# Altium PCB Tigershark 3D R1.2.PcbDoc (part 1 of 3)
Units mil, origin at the board's own origin, x right, y up, seen from the top; angles counter-clockwise.
Board outline 6000 x 4500 mil, 4 copper layers (Top Layer, Groun Plane, Power Plane, Bottom Layer); 257 components, 247 nets, 1014 pads, 620 vias.
Unrouted connection lines stored in the file: 332.
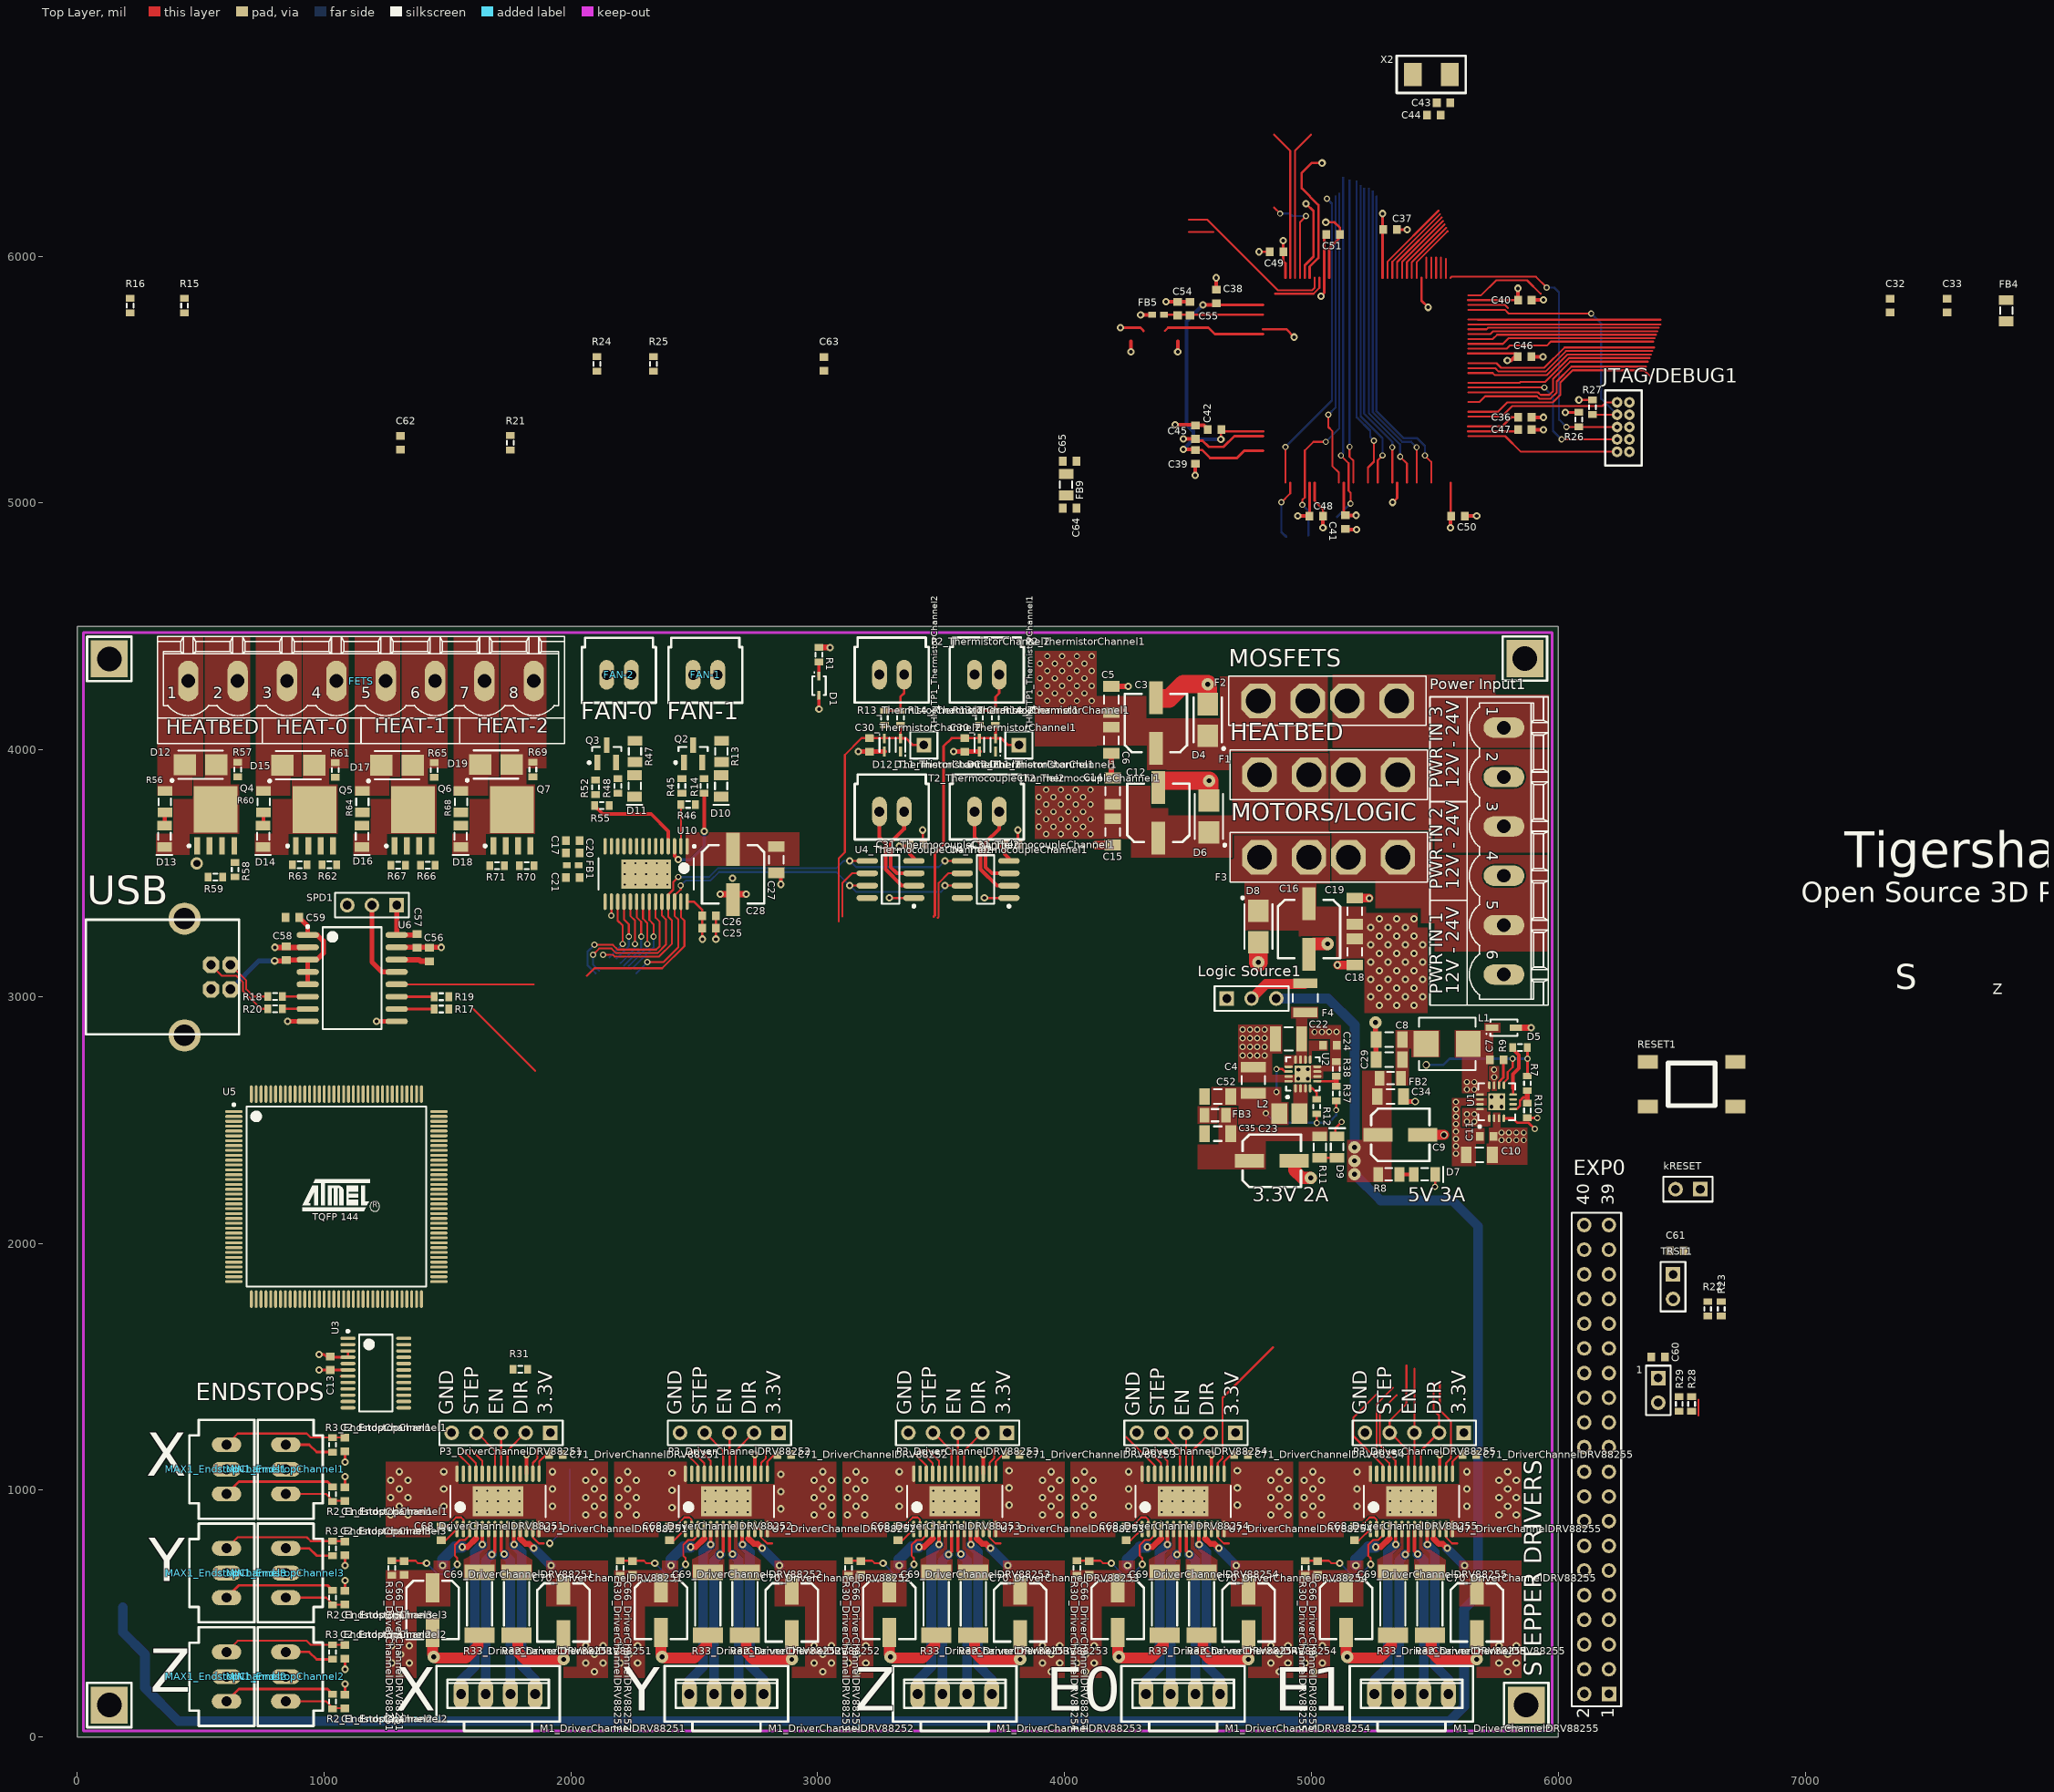
[diagram p0: Top Layer view]
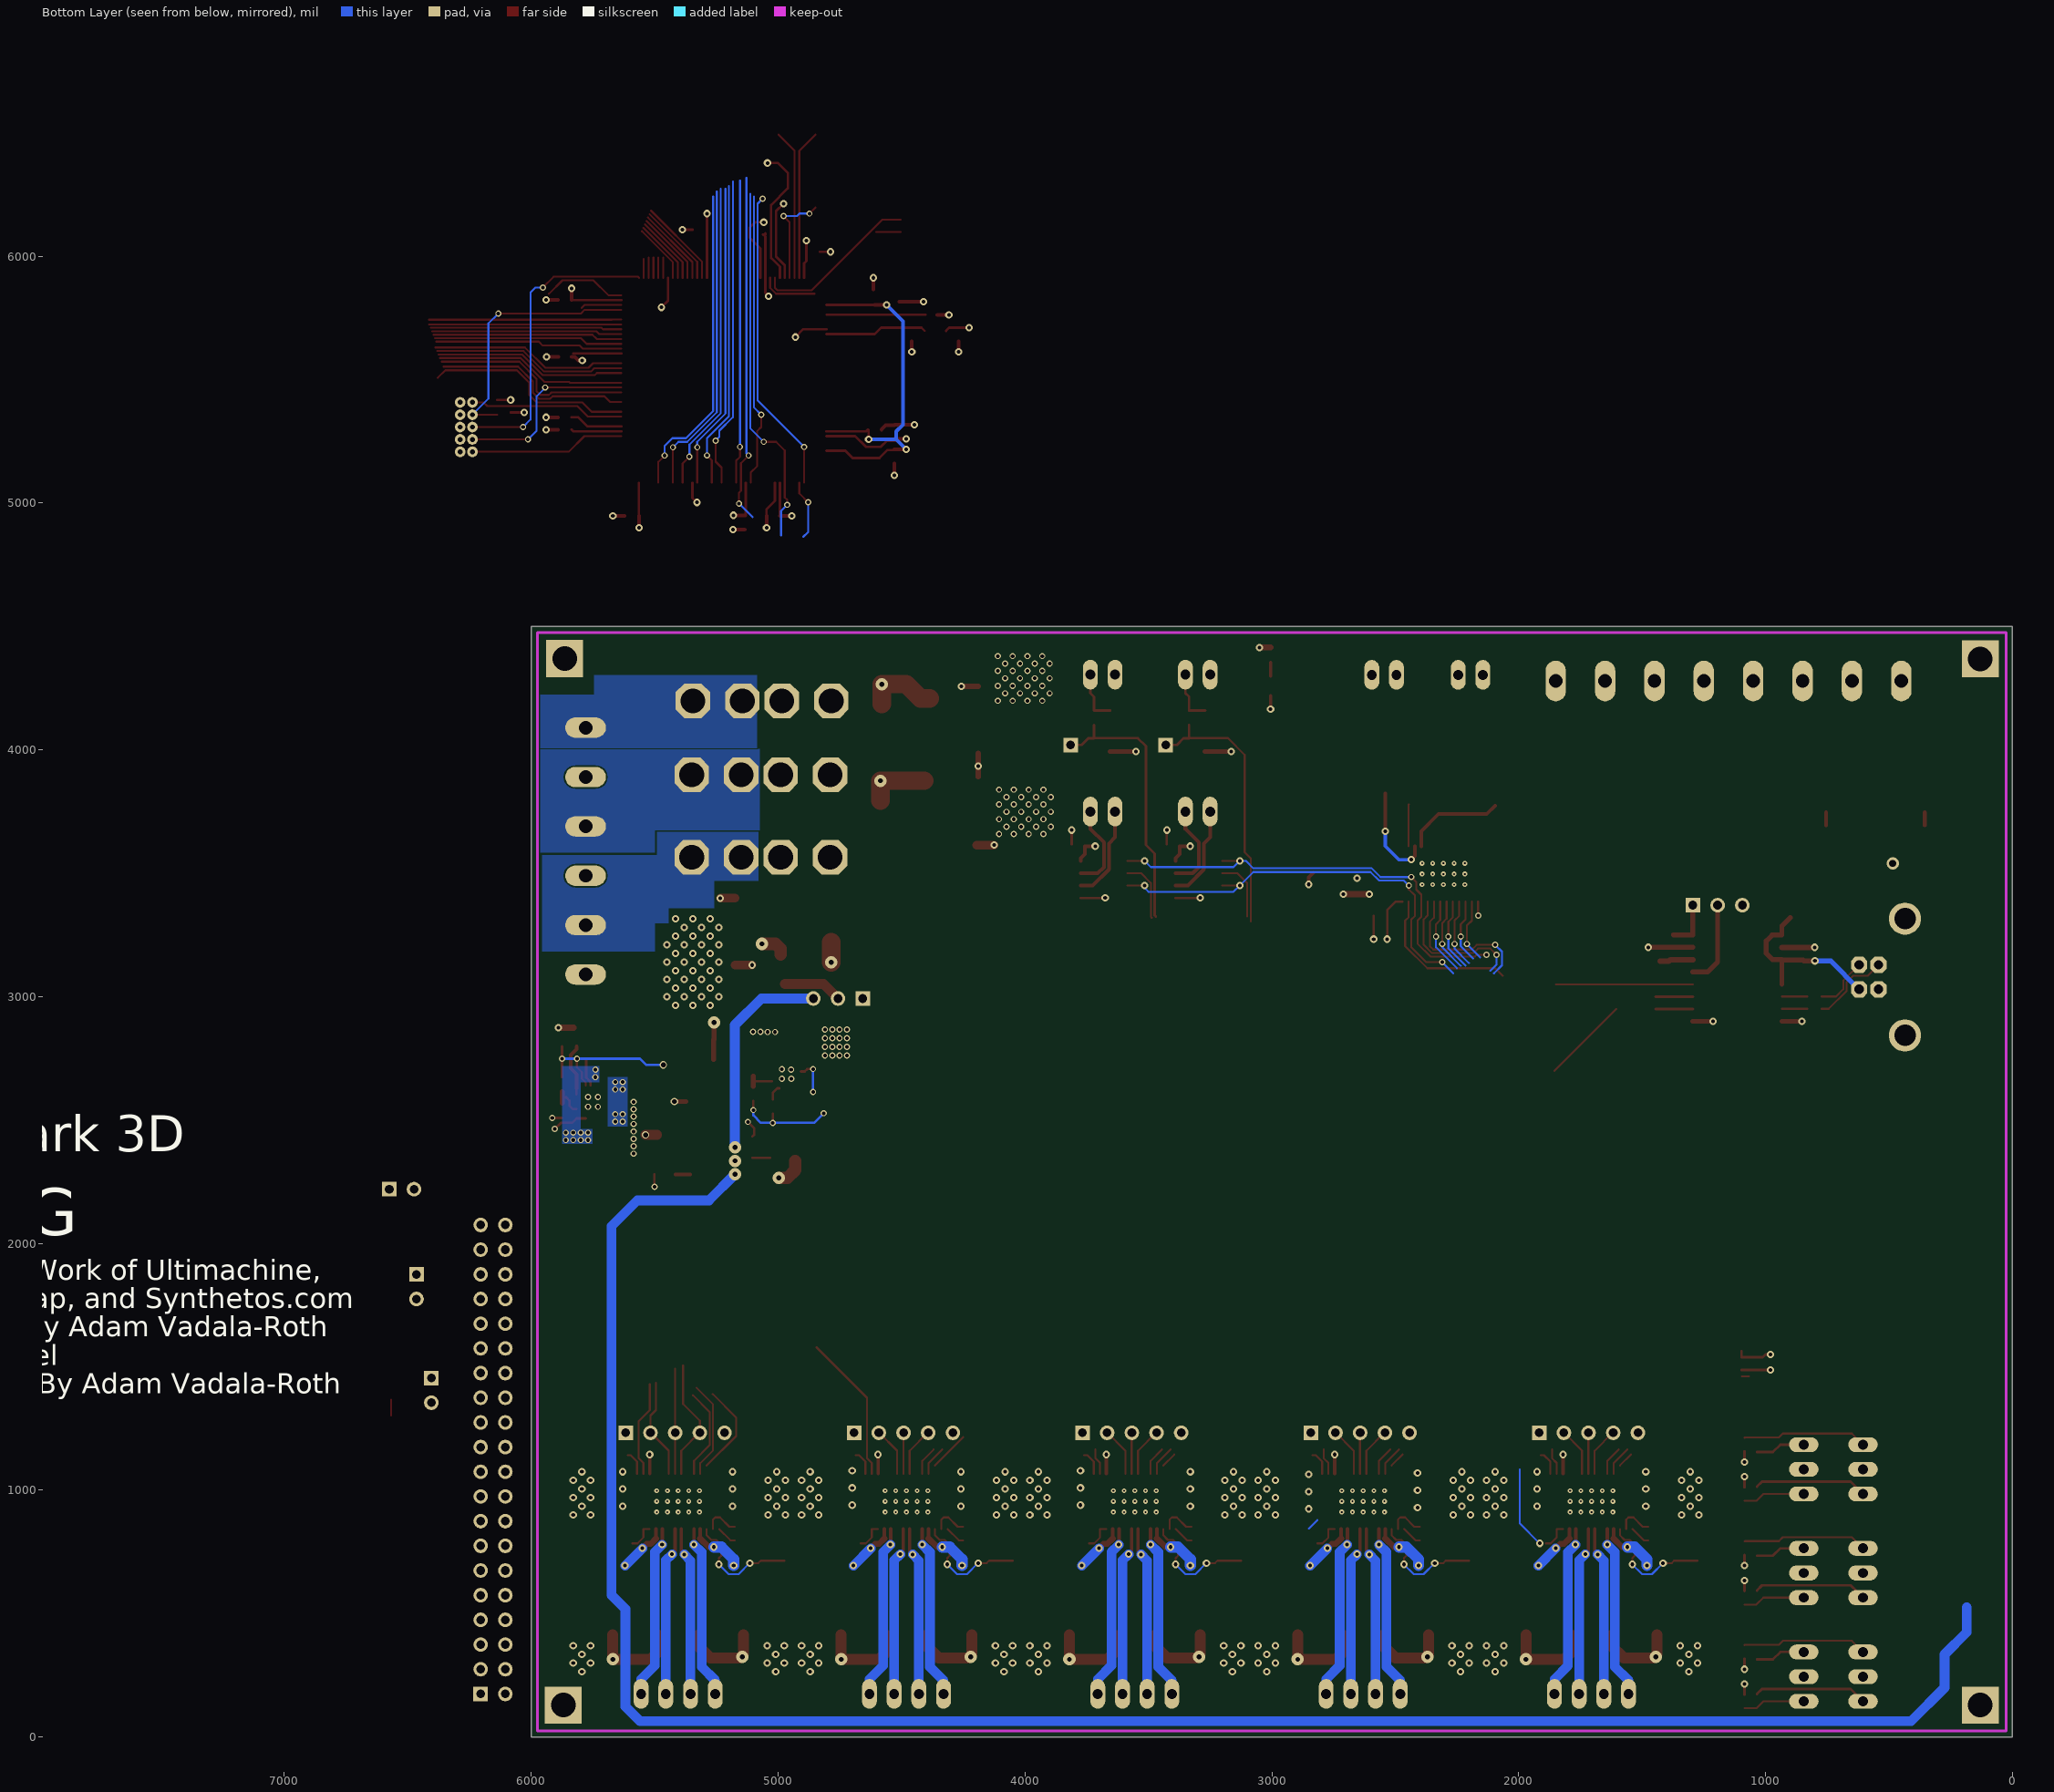
[diagram p1: Bottom Layer view, seen from below]
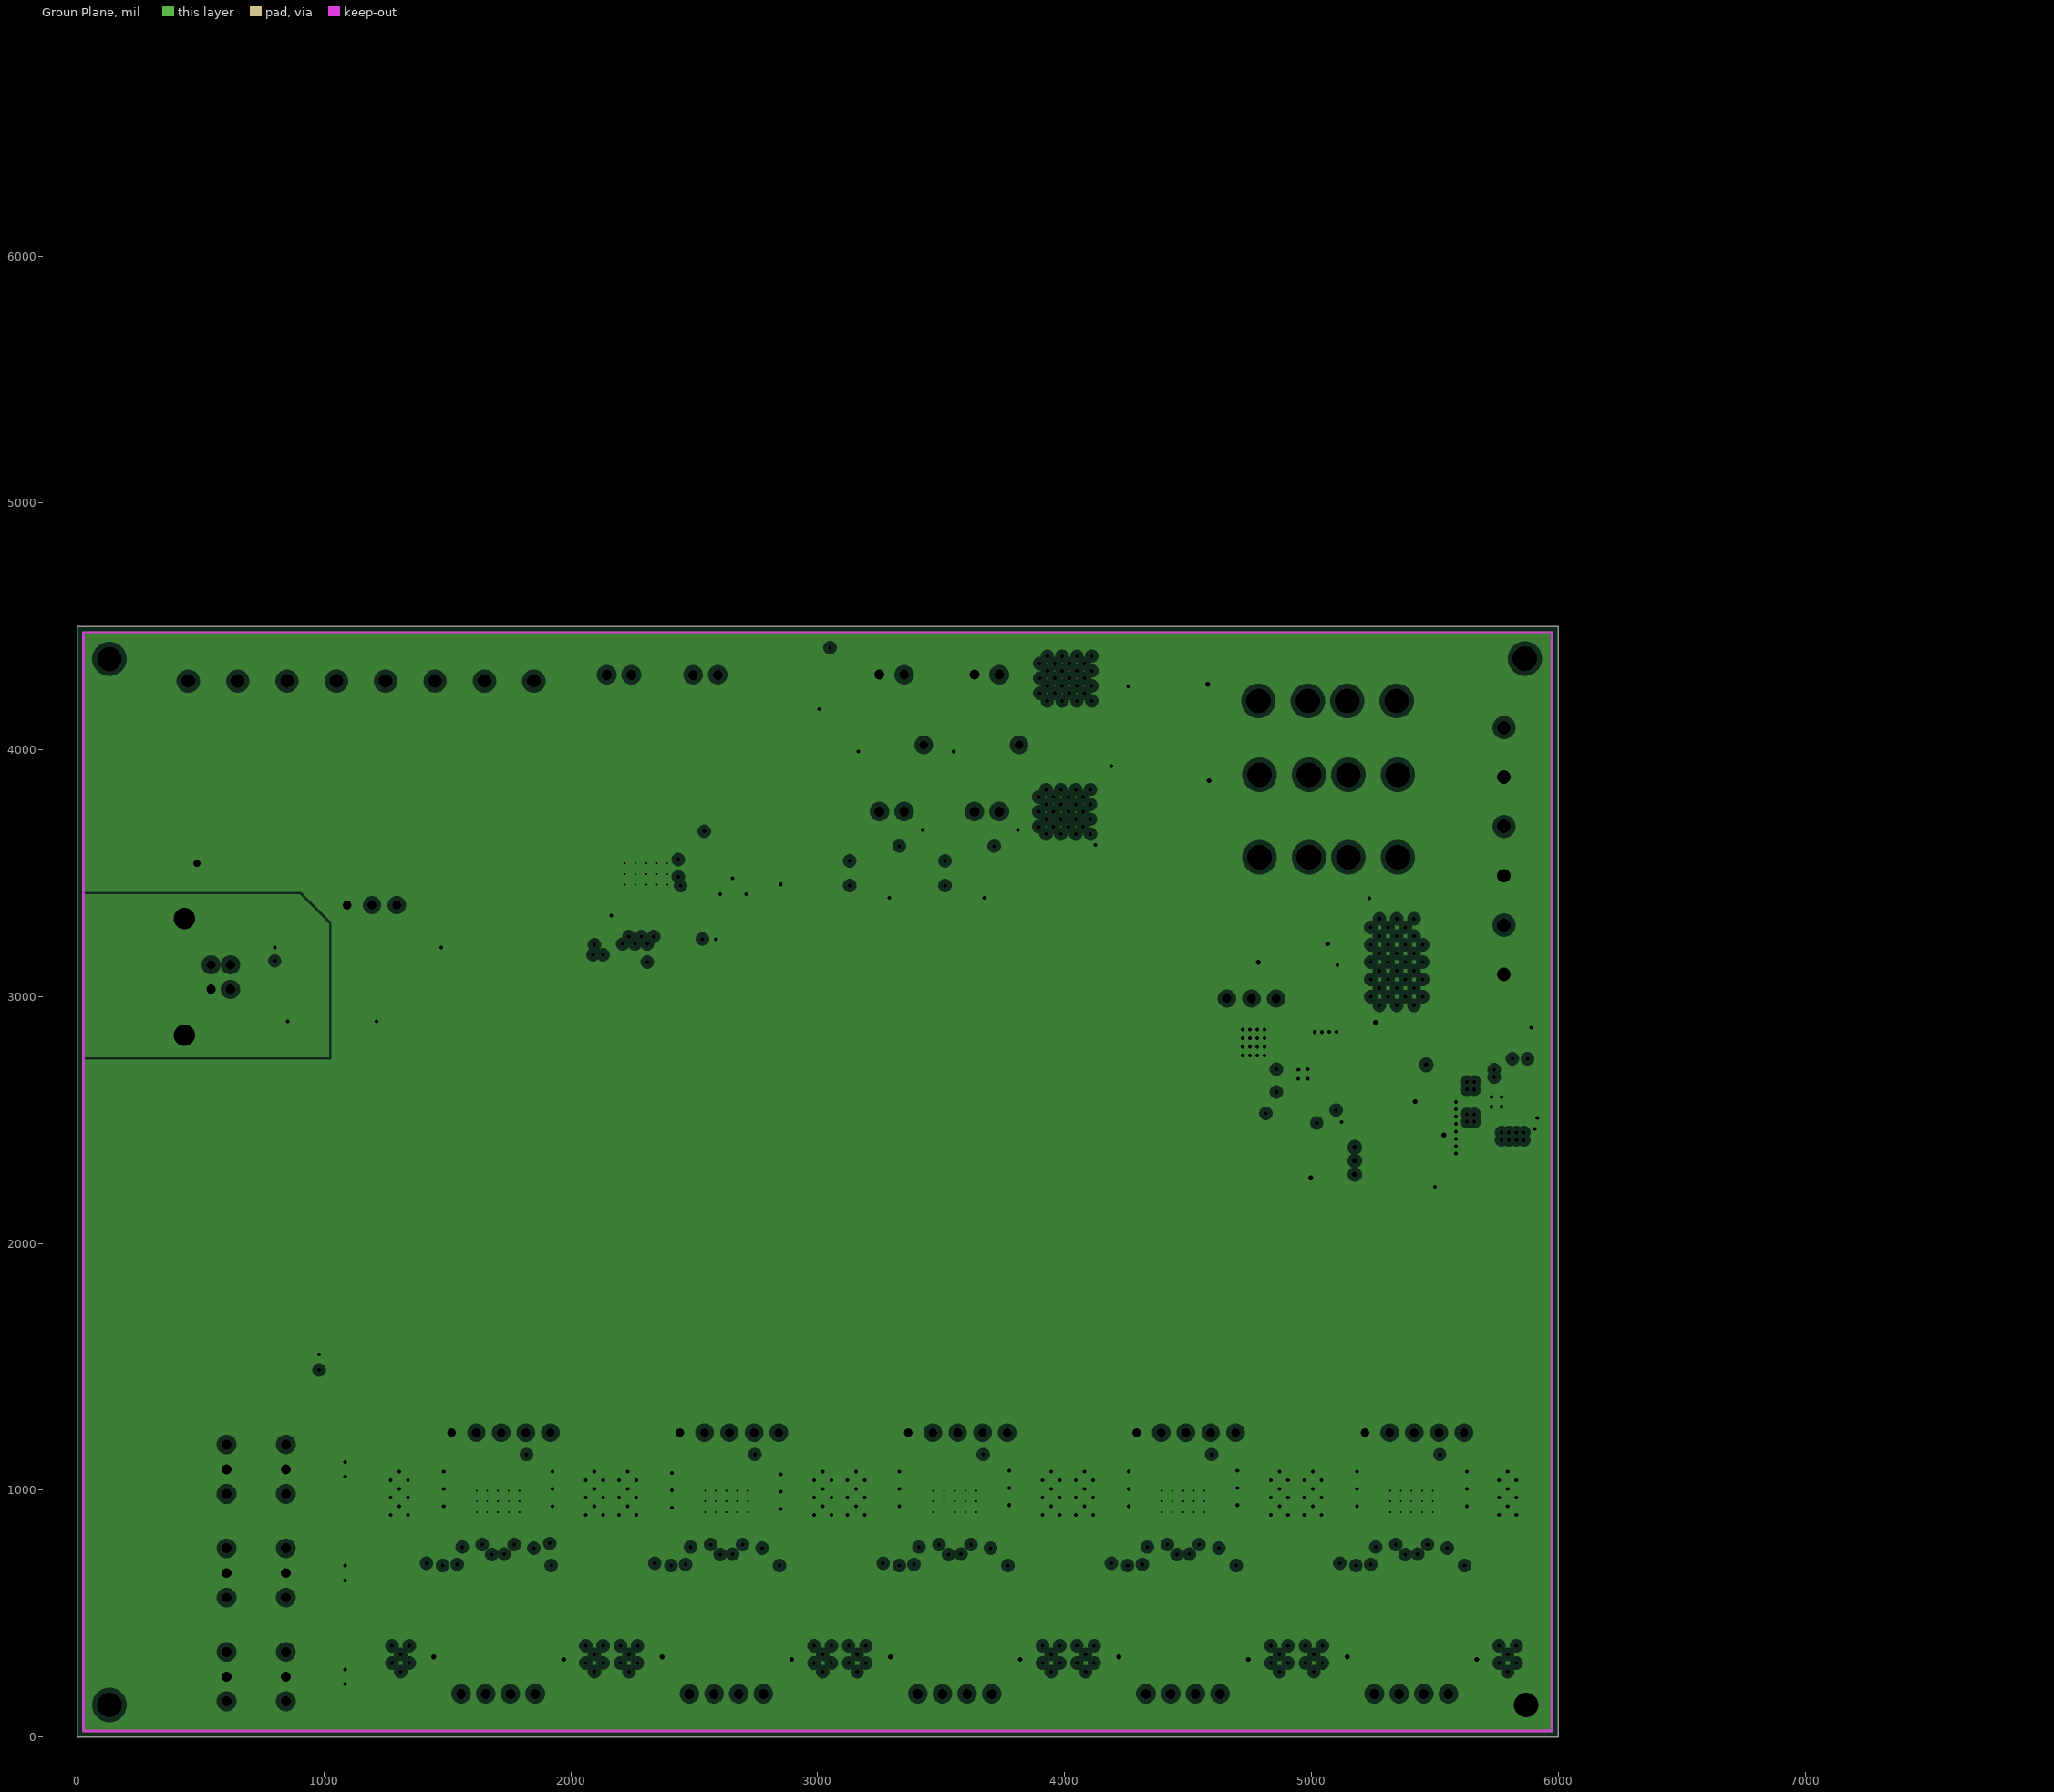
[diagram p2: Groun Plane, clearances drawn from the general rule]
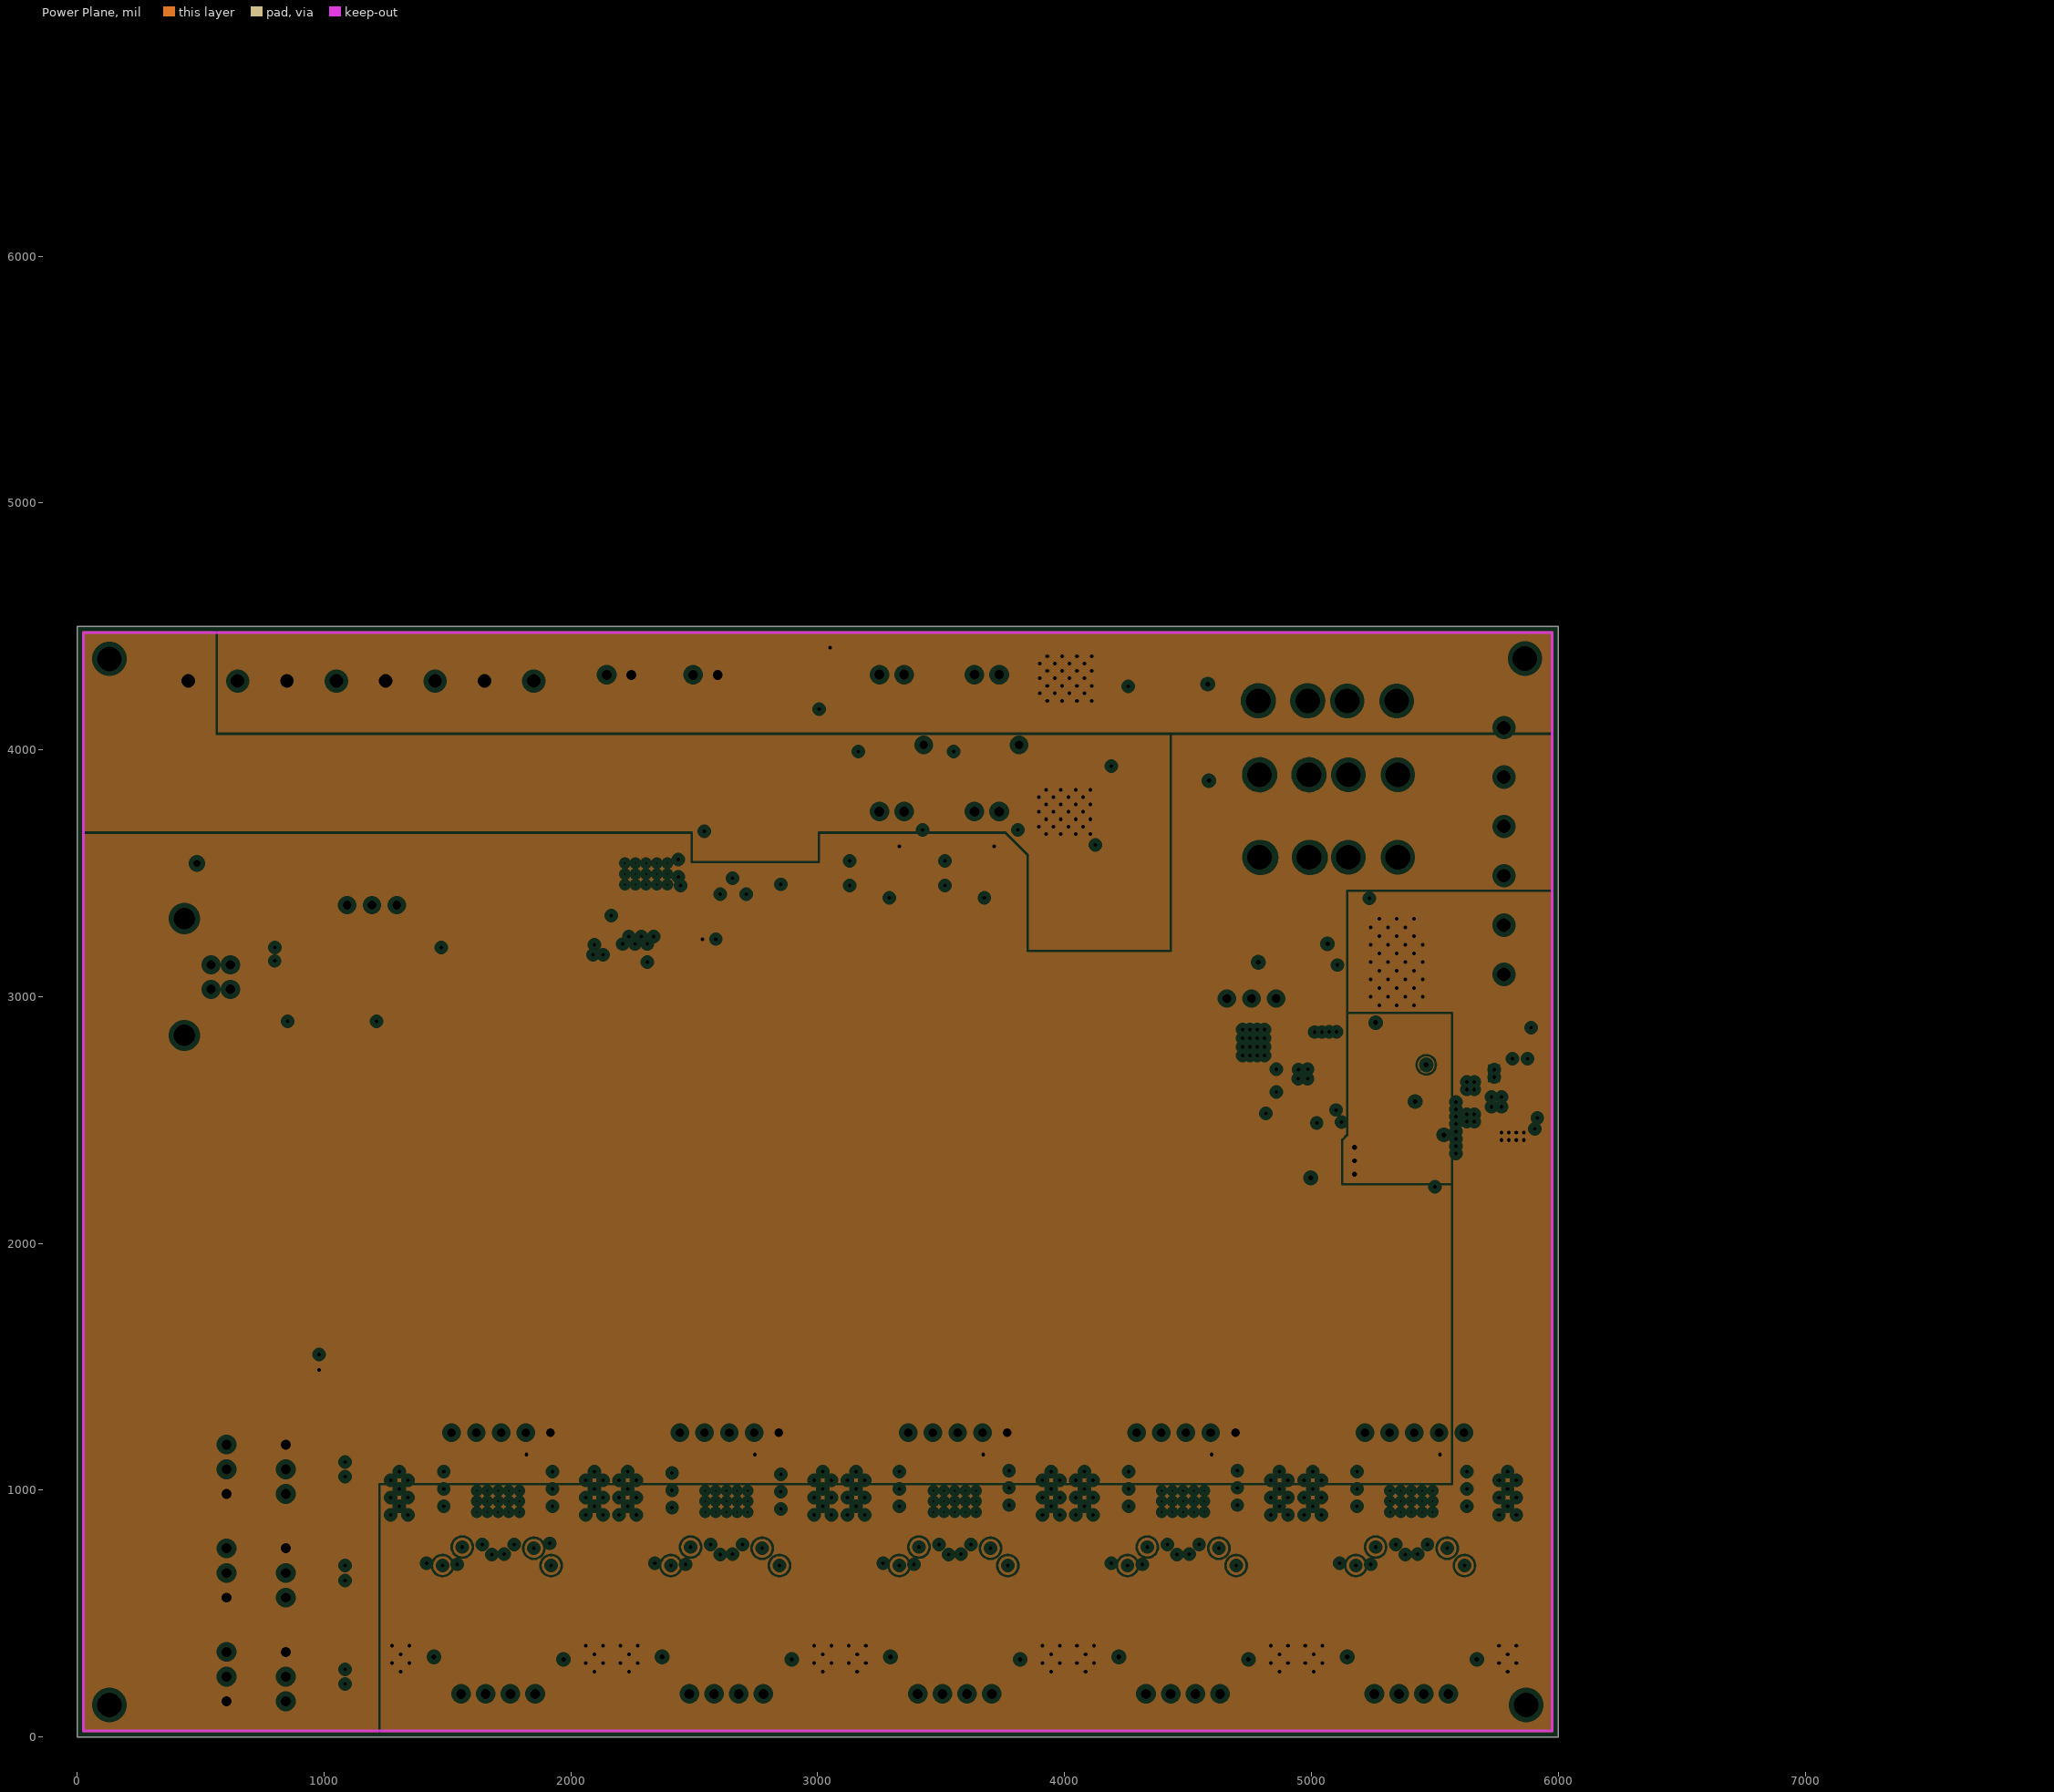
[diagram p3: Power Plane, clearances drawn from the general rule]

## Layer stack, top to bottom
Top Layer: signal copper 1.4
Dielectric: core 12.6, FR-4, Dk 4.8
Groun Plane: plane copper 1.4, net (Multiple Nets)
Dielectric: prepreg 12.6, FR-4, Dk 4.8
Power Plane: plane copper 1.4, net (Multiple Nets)
Dielectric: core 12.6, FR-4, Dk 4.8
Bottom Layer: signal copper 1.4

## Board outline
0,0 0,4500 6000,4500 6000,0

## Design rules (kind name [scope] priority, off if disabled: settings)
Clearance [All] p1: gap=6
ComponentClearance [All] p1: gap=0 collisioncheckmode=3 verticalgap=10 showdistances=FALSE
FanoutControl Fanout_SOIC [(InComponent('U8') AND InComponent('U7'))] p3: bgadir=Out bgaviamode=Centered fanoutstyle=Staggered fanoutdirection=Alternating viagrid=1 // Fanout_SOIC (Default Rule)
FanoutControl Fanout_Small [All] p4: bgadir=Out bgaviamode=Centered fanoutstyle=Auto fanoutdirection=Alternating viagrid=1 // Fanout_Small (Default Rule)
HoleSize [All] p1: absolutevalues=TRUE maxlimit=120 minlimit=1 maxpercent=80.000 minpercent=20.000
MinimumSolderMaskSliver [All] p1 off: minsoldermaskwidth=10
PlaneClearance [All] p1: clearance=20
PlaneConnect [All] p1: planeconnectstyle=Direct reliefexpansion=20 reliefentries=4 reliefconductorwidth=10 reliefairgap=10
PolygonConnect [All] p1: connectstyle=Direct reliefconductorwidth=45 reliefentries=4 polygonreliefangle="90 Angle" airgapwidth=10
RoomDefinition ThermistorChannel2 [InComponentClass('ThermistorChannel2')] p1: confinementstyle=ConfineIn formatcopy=TRUE lockcomponents=FALSE outline 3495,3920 3495,4485 3110,4485 3110,3920
RoomDefinition ThermistorChannel1 [InComponentClass('ThermistorChannel1')] p2: confinementstyle=ConfineIn formatcopy=TRUE lockcomponents=FALSE outline 3880,3920 3880,4485 3495,4485 3495,3920
RoomDefinition ThermocoupleChannel2 [InComponentClass('ThermocoupleChannel2')] p3: confinementstyle=ConfineIn formatcopy=TRUE lockcomponents=TRUE outline 3495,3350 3495,3920 3110,3920 3110,3350
RoomDefinition ThermocoupleChannel1 [InComponentClass('ThermocoupleChannel1')] p4: confinementstyle=ConfineIn formatcopy=TRUE lockcomponents=TRUE outline 3880,3350 3880,3920 3495,3920 3495,3350
RoomDefinition EndstopChannel3 [InComponentClass('EndstopChannel3')] p5: confinementstyle=ConfineIn formatcopy=TRUE lockcomponents=TRUE outline 425,455 1125,455 1125,875 425,875
RoomDefinition EndstopChannel2 [InComponentClass('EndstopChannel2')] p6: confinementstyle=ConfineIn formatcopy=TRUE lockcomponents=TRUE outline 425,35 1125,35 1125,455 425,455
RoomDefinition EndstopChannel1 [InComponentClass('EndstopChannel1')] p7: confinementstyle=ConfineIn formatcopy=TRUE lockcomponents=FALSE outline 425,875 1125,875 1125,1295 425,1295
RoomDefinition DriverChannelDRV88255 [InComponentClass('DriverChannelDRV88255')] p8: confinementstyle=ConfineIn formatcopy=TRUE lockcomponents=TRUE outline 4950,0 5875,0 5875,1300 4950,1300
RoomDefinition DriverChannelDRV88254 [InComponentClass('DriverChannelDRV88254')] p9: confinementstyle=ConfineIn formatcopy=TRUE lockcomponents=TRUE outline 4025,0 4950,0 4950,1300 4025,1300
RoomDefinition DriverChannelDRV88253 [InComponentClass('DriverChannelDRV88253')] p10: confinementstyle=ConfineIn formatcopy=TRUE lockcomponents=TRUE outline 3100,0 4025,0 4025,1300 3100,1300
RoomDefinition DriverChannelDRV88252 [InComponentClass('DriverChannelDRV88252')] p11: confinementstyle=ConfineIn formatcopy=TRUE lockcomponents=FALSE outline 2175,0 3100,0 3100,1300 2175,1300
RoomDefinition DriverChannelDRV88251 [InComponentClass('DriverChannelDRV88251')] p12: confinementstyle=ConfineIn formatcopy=TRUE lockcomponents=FALSE outline 1250,0 2175,0 2175,1300 1250,1300
RoutingVias [All] p1: holewidth=15 width=25 viastyle="Through Hole" minholewidth=15 minwidth=25 maxholewidth=28 maxwidth=50
SilkToSilkClearance [All] p1 off: silktosilkclearance=10
SilkToSolderMaskClearance SilkscreenOverComponentPads [IsPad] p1 off: minsilkscreentomaskgap=10 clearancetoexposedcopper=TRUE
SolderMaskExpansion [All] p1: expansion=4
Width [All] p1: maxlimit=200 minlimit=6 preferedwidth=6 minimp=50.000000 maximp=50.000000 favimp=50.000000
19 further rules are at their usual default settings.

## Classes and differential pairs
channel class "Thermistor Channel": ThermistorChannel1 ThermistorChannel2
component class ThermistorChannel2: C30_ThermistorChannel2 D11_ThermistorChannel2 D12_ThermistorChannel2 P2_ThermistorChannel2 R13_ThermistorChannel2 R14_ThermistorChannel2 THM_TP1_ThermistorChannel2
component class ThermistorChannel1: C30_ThermistorChannel1 D11_ThermistorChannel1 D12_ThermistorChannel1 P2_ThermistorChannel1 R13_ThermistorChannel1 R14_ThermistorChannel1 THM_TP1_ThermistorChannel1
net class THERM_ANBUS[1..2]: THERM_AN0
net class TC_CS_BUS[1..2]: TC_CS0
net class SCLK[1..2]: SCLK0 SCLK1 SCLK2
net class MISO[1..2]: MISO0 MISO1 MISO2
net class MIN_ES_BUS[1..3]: MIN_ES0
net class MAX_ES_BUS[1..3]: MAX_ES0
component class "U_Offboard Kinen Expansion": EXP0
component class Designator: C3 C4 C5 C6 C7 C8 C9 C10 C11 C12 C14 C15 C16 C18 C19 C22 C23 C24 C29 C34 C35 C52 D1 D4 D5 D6 D7 D8 D9 F1 F2 F3 F4 FB2 FB3 L1 L2 "Logic Source1" "Power Input1" R1 R7 R8 R9 R10 R11 R12 R37 R38 U1 U2
component class "ATSAM4E16EA_AU Main Controller": 1 C13 C32 C33 C36 C37 C38 C39 C40 C41 C42 C43 C44 C45 C46 C47 C48 C49 C50 C51 C54 C55 C56 C57 C58 C59 C60 C61 C62 C63 C64 C65 FB4 FB5 FB9 JTAG/DEBUG1 kRESET R15 R16 R17 R18 R19 R20 R21 R22 R23 R24 R25 R26 R27 R28 R29 R31 RESET1 SPD1 TRST1 U3 U5 U6 USB X2
component class DriverChannelDRV88251: C66_DriverChannelDRV88251 C68_DriverChannelDRV88251 C69_DriverChannelDRV88251 C70_DriverChannelDRV88251 C71_DriverChannelDRV88251 M1_DriverChannelDRV88251 P3_DriverChannelDRV88251 R30_DriverChannelDRV88251 R32_DriverChannelDRV88251 R33_DriverChannelDRV88251 U7_DriverChannelDRV88251
component class DriverChannelDRV88252: C66_DriverChannelDRV88252 C68_DriverChannelDRV88252 C69_DriverChannelDRV88252 C70_DriverChannelDRV88252 C71_DriverChannelDRV88252 M1_DriverChannelDRV88252 P3_DriverChannelDRV88252 R30_DriverChannelDRV88252 R32_DriverChannelDRV88252 R33_DriverChannelDRV88252 U7_DriverChannelDRV88252
component class DriverChannelDRV88253: C66_DriverChannelDRV88253 C68_DriverChannelDRV88253 C69_DriverChannelDRV88253 C70_DriverChannelDRV88253 C71_DriverChannelDRV88253 M1_DriverChannelDRV88253 P3_DriverChannelDRV88253 R30_DriverChannelDRV88253 R32_DriverChannelDRV88253 R33_DriverChannelDRV88253 U7_DriverChannelDRV88253
component class DriverChannelDRV88254: C66_DriverChannelDRV88254 C68_DriverChannelDRV88254 C69_DriverChannelDRV88254 C70_DriverChannelDRV88254 C71_DriverChannelDRV88254 M1_DriverChannelDRV88254 P3_DriverChannelDRV88254 R30_DriverChannelDRV88254 R32_DriverChannelDRV88254 R33_DriverChannelDRV88254 U7_DriverChannelDRV88254
component class DriverChannelDRV88255: C66_DriverChannelDRV88255 C68_DriverChannelDRV88255 C69_DriverChannelDRV88255 C70_DriverChannelDRV88255 C71_DriverChannelDRV88255 M1_DriverChannelDRV88255 P3_DriverChannelDRV88255 R30_DriverChannelDRV88255 R32_DriverChannelDRV88255 R33_DriverChannelDRV88255 U7_DriverChannelDRV88255
component class EndstopChannel1: C1_EndstopChannel1 C2_EndstopChannel1 MAX1_EndstopChannel1 MIN1_EndstopChannel1 R2_EndstopChannel1 R3_EndstopChannel1
component class EndstopChannel2: C1_EndstopChannel2 C2_EndstopChannel2 MAX1_EndstopChannel2 MIN1_EndstopChannel2 R2_EndstopChannel2 R3_EndstopChannel2
component class EndstopChannel3: C1_EndstopChannel3 C2_EndstopChannel3 MAX1_EndstopChannel3 MIN1_EndstopChannel3 R2_EndstopChannel3 R3_EndstopChannel3
component class ThermocoupleChannel1: C31_ThermocoupleChannel1 T2_ThermocoupleChannel1 U4_ThermocoupleChannel1
component class ThermocoupleChannel2: C31_ThermocoupleChannel2 T2_ThermocoupleChannel2 U4_ThermocoupleChannel2
channel class "Driver Channel DRV8825": DriverChannelDRV88251 DriverChannelDRV88252 DriverChannelDRV88253 DriverChannelDRV88254 DriverChannelDRV88255
channel class "Endstop Channel": EndstopChannel1 EndstopChannel2 EndstopChannel3
channel class "Thermocouple Channel": ThermocoupleChannel1 ThermocoupleChannel2
component class "U_MOSFETs and Driver": C17 C20 C21 C25 C26 C27 C28 D10 D11 D12 D13 D14 D15 D16 D17 D18 D19 FAN-1 FAN-2 FB1 FETS Q2 Q3 Q4 Q5 Q6 Q7 R13 R14 R45 R46 R47 R48 R52 R55 R56 R57 R58 R59 R60 R61 R62 R63 R64 R65 R66 R67 R68 R69 R70 R71 U10

## Components (designator, comment, footprint, x,y, rotation, side; value= is the part's Value field where it differs from the comment)
1 "Header 2" HDR1X2 6405,1455 r270 top
C1_EndstopChannel1 "0603" 1608[0603] 1085,984.53 r90 top (schematic designator C1)
C1_EndstopChannel2 "0603" 1608[0603] 1085,144.53 r90 top (schematic designator C1)
C1_EndstopChannel3 "0603" 1608[0603] 1085,564.53 r90 top (schematic designator C1)
C2_EndstopChannel1 "0603" 1608[0603] 1085,1185 r270 top (schematic designator C2)
C2_EndstopChannel2 "0603" 1608[0603] 1085,345 r270 top (schematic designator C2)
C2_EndstopChannel3 "0603" 1608[0603] 1085,765 r270 top (schematic designator C2)
C3 "VAS D" "Panasonic VS D" 4370,4109 r270 top
C4 "1210" C1210 4764.45,2661.82 r90 top
C5 "1206" C1206 4190,4204 r270 top
C6 "1206" C1206 4190,4039 r90 top
C7 "Cap Semi" 1608[0603] 5750,2744 r0 top
C8 "Cap Semi" C1206 5315,2826 r0 top
C9 "VS C" "Panasonic VS C" 5480,2555 r180 top
C10 "Cap Semi" C1206 5680,2359 r0 top
C11 "Cap Semi" 1608[0603] 5710,2434 r0 top
C12 "VAS D" "Panasonic VS D" 4380,3745.02 r270 top
C13 "Cap Semi" 1608[0603] 1025,1515 r270 top
C14 "1206" C1206 4195,3832.66 r270 top
C15 "1206" C1206 4195,3667.66 r90 top
C16 "VAS D" "Panasonic VS D" 4990,3274 r90 top
C17 "0603" 1608[0603] 2007.28,3632.2 r180 top
C18 "1206" C1206 5175,3181.36 r90 top
C19 "1206" C1206 5175,3346.36 r270 top
C20 "0603" 1608[0603] 2007.28,3582.2 r0 top
C21 "0603" 1608[0603] 2007.28,3482.2 r0 top
C22 "1210" C1210 4907.45,2828.82 r180 top
C23 "VS C" "Panasonic VS C" 4959.45,2450 r180 top
C24 "0603" 1608[0603] 5074.45,2802.82 r180 top
C25 "0603" 1608[0603] 2559.84,3277.2 r180 top
C26 "0603" 1608[0603] 2559.84,3327.2 r0 top
C27 "1206" C1206 2832.28,3555.32 r90 top
C28 "VAS D" "Panasonic VS D" 2657.28,3495.32 r90 top
C29 "1206" C1206 5315,2745 r180 top
C30_ThermistorChannel1 "Cap Semi" 1608[0603] 3595,4020 r90 top (schematic designator C30)
C30_ThermistorChannel2 "Cap Semi" 1608[0603] 3210,4020 r90 top (schematic designator C30)
C31_ThermocoupleChannel1 "Cap Semi" 1608[0603] 3785.51,3615 r180 top (schematic designator C31)
C31_ThermocoupleChannel2 "Cap Semi" 1608[0603] 3400.51,3615 r180 top (schematic designator C31)
C32 "0603" 1608[0603] 7345,5799.53 r90 top
C33 "0603" 1608[0603] 7575,5799.53 r90 top
C34 "1206" C1206 5320,2595 r0 top
C35 "1206" C1206 4620,2445 r180 top
C36 "0603" 1608[0603] 5864.36,5347.67 r180 top
C37 "0603" 1608[0603] 5318.26,6108.02 r180 top
C38 "0603" 1608[0603] 4614.36,5837.67 r270 top
C39 "0603" 1608[0603] 4529.36,5187.67 r90 top
C40 "0603" 1608[0603] 5864.36,5822.67 r180 top
C41 "0603" 1608[0603] 5138.26,4923.02 r90 top
C42 "0603" 1608[0603] 4608.26,5298.02 r0 top
C43 "0603" 1608[0603] 5535.41,6621.97 r180 top
C44 "0603" 1608[0603] 5495.41,6571.97 r180 top
C45 "0603" 1608[0603] 4529.36,5287.67 r270 top
C46 "0603" 1608[0603] 5863.26,5593.02 r180 top
C47 "0603" 1608[0603] 5864.36,5297.67 r180 top
C48 "0603" 1608[0603] 5019.36,4947.67 r180 top
C49 "0603" 1608[0603] 4858.26,6018.02 r0 top
C50 "0603" 1608[0603] 5594.36,4947.67 r180 top
C51 "0603" 1608[0603] 5088.26,6088.02 r0 top
C52 "1206" C1206 4620,2595 r180 top
C54 "0603" 1608[0603] 4458.26,5788.02 r270 top
C55 "0603" 1608[0603] 4508.26,5788.02 r270 top
C56 "0603" 1608[0603] 1427,3171 r270 top
C57 "0603" 1608[0603] 1377,3226 r90 top
C58 "0603" 1608[0603] 847,3176 r270 top
C59 "0603" 1608[0603] 872,3321 r0 top
C60 "Cap Semi" 1608[0603] 6405,1540 r180 top
C61 "Cap Semi" 1608[0603] 6480,1970 r180 top
C62 "Cap Semi" 1608[0603] 1310,5244.53 r90 top
C63 "Cap Semi" 1608[0603] 3025,5564.53 r90 top
C64 "0603" 1608[0603] 4020.72,4979.45 r180 top
C65 "0603" 1608[0603] 4020.72,5169.45 r180 top
C66_DriverChannelDRV88251 "0603" 1608[0603] 1325,685 r90 top (schematic designator C66)
C66_DriverChannelDRV88252 "0603" 1608[0603] 2250,685 r90 top (schematic designator C66)
C66_DriverChannelDRV88253 "0603" 1608[0603] 3175,685 r90 top (schematic designator C66)
C66_DriverChannelDRV88254 "0603" 1608[0603] 4100,685 r90 top (schematic designator C66)
C66_DriverChannelDRV88255 "0603" 1608[0603] 5025,685 r90 top (schematic designator C66)
C68_DriverChannelDRV88251 "0603" 1608[0603] 1475,825 r90 top (schematic designator C68)
C68_DriverChannelDRV88252 "0603" 1608[0603] 2400,825 r90 top (schematic designator C68)
C68_DriverChannelDRV88253 "0603" 1608[0603] 3325,825 r90 top (schematic designator C68)
C68_DriverChannelDRV88254 "0603" 1608[0603] 4250,825 r90 top (schematic designator C68)
C68_DriverChannelDRV88255 "0603" 1608[0603] 5175,825 r90 top (schematic designator C68)
C69_DriverChannelDRV88251 "VS C" "Panasonic VS C" 1555,395 r90 top (schematic designator C69)
C69_DriverChannelDRV88252 "VS C" "Panasonic VS C" 2480,395 r90 top (schematic designator C69)
C69_DriverChannelDRV88253 "VS C" "Panasonic VS C" 3405,395 r90 top (schematic designator C69)
C69_DriverChannelDRV88254 "VS C" "Panasonic VS C" 4330,395 r90 top (schematic designator C69)
C69_DriverChannelDRV88255 "VS C" "Panasonic VS C" 5255,395 r90 top (schematic designator C69)
C70_DriverChannelDRV88251 "VS C" "Panasonic VS C" 2085,385 r90 top (schematic designator C70)
C70_DriverChannelDRV88252 "VS C" "Panasonic VS C" 3010,385 r90 top (schematic designator C70)
C70_DriverChannelDRV88253 "VS C" "Panasonic VS C" 3935,385 r90 top (schematic designator C70)
C70_DriverChannelDRV88254 "VS C" "Panasonic VS C" 4860,385 r90 top (schematic designator C70)
C70_DriverChannelDRV88255 "VS C" "Panasonic VS C" 5785,385 r90 top (schematic designator C70)
C71_DriverChannelDRV88251 "0603" 1608[0603] 1940,1145 r180 top (schematic designator C71)
C71_DriverChannelDRV88252 "0603" 1608[0603] 2865,1145 r180 top (schematic designator C71)
C71_DriverChannelDRV88253 "0603" 1608[0603] 3790,1145 r180 top (schematic designator C71)
C71_DriverChannelDRV88254 "0603" 1608[0603] 4715,1145 r180 top (schematic designator C71)
C71_DriverChannelDRV88255 "0603" 1608[0603] 5640,1145 r180 top (schematic designator C71)
D1 "SZMM3Z4V7T1G" SZMM3Z4V7T1G 3005,4260 r90 top
D4 "SK310A-TP" SK310A-TP 4580,4121.36 r270 top
D5 "PMEG1030EH_EJ" PMEG1030EH_EJ 5780,2874 r180 top
D6 "SK310A-TP" SK310A-TP 4585,3730.02 r270 top
D7 "LED2" "SM 0805 polarized" 5538.23,2236.5 r180 top
D8 "SK310A-TP" SK310A-TP 4785,3284 r90 top
D9 "LED2" "SM 0805 polarized" 5147.45,2470.82 r270 top
D10 "LED1" "SM 0805 polarized" 2565,3773.94 r90 top
D11 "LED1" "SM 0805 polarized" 2215,3773.94 r90 top
D11_ThermistorChannel1 "Diode 1N4148" 1N4148WT 3720,4020 r270 top (schematic designator D11)
D11_ThermistorChannel2 "Diode 1N4148" 1N4148WT 3335,4020 r270 top (schematic designator D11)
D12 "B240A-13-F" SK310A-TP 500,3940 r180 top
D12_ThermistorChannel1 "Diode 1N4148" 1N4148WT 3655,4020 r90 top (schematic designator D12)
D12_ThermistorChannel2 "Diode 1N4148" 1N4148WT 3270,4020 r90 top (schematic designator D12)
D13 "LED1" "SM 0805 polarized" 310,3570 r90 top
D14 "LED1" "SM 0805 polarized" 710,3570 r90 top
D15 "B240A-13-F" SK310A-TP 896,3938 r180 top
D16 "LED1" "SM 0805 polarized" 1110,3570 r90 top
D17 "B240A-13-F" SK310A-TP 1296,3938 r180 top
D18 "LED1" "SM 0805 polarized" 1510,3570 r90 top
D19 "B240A-13-F" SK310A-TP 1696,3940.64 r180 top
EXP0 "Header 20X2" HDR2X20 6205,175 r90 top
F1 "3522-2" 3522-2 5070,3899 r180 top
F2 "3522-2" 3522-2 5065,4199 r180 top
F3 "3522-2" 3522-2 5070,3565 r180 top
F4 "LittleFuse F1210" F1210_M 4975,2995 r90 top
FAN-1 "Molex 70543-02" 70543-02 2545,4303.94 r180 top
FAN-2 "Molex 70543-02" 70543-02 2195,4303.94 r180 top
FB1 "BLM15HG601SN1D" BLM18PG121SN1D 2007.28,3532.2 r180 top
FB2 "MH2029-300Y" "SM 0805 - gap trimmed" 5320,2670 r180 top
FB3 "MH2029-300Y" "SM 0805 - gap trimmed" 4610,2520 r0 top
FB4 "MH2029-300Y" "SM 0805 - gap trimmed" 7815,5779.53 r90 top
FB5 "BLM15HG601SN1D" BLM18PG121SN1D 4378.26,5763.02 r0 top
FB9 "MH2029-300Y" "SM 0805 - gap trimmed" 4005.72,5074.45 r90 top
FETS "con-phoenix-508 - 8" MSTBV4 1150,4278.94 r90 top
JTAG/DEBUG1 "S9015E-05-ND" S9015E-05-ND 6288.26,5408.02 r270 top
kRESET "Header 2" HDR1X2 6575,2220 r180 top
L1 "Inductor" CIP0530LR3R3 5550,2809 r180 top
L2 "VLS252012T-2R2M1R3" VLS252012T-2R2M1R3 4910.45,2526.82 r180 top
"Logic Source1" "Header 3" HDR1X3 4657.45,2992.55 r0 top
M1_DriverChannelDRV88251 "Molex 0705430003" 4POL254 1705,175 r0 top (schematic designator M1)
M1_DriverChannelDRV88252 "Molex 0705430003" 4POL254 2630,175 r0 top (schematic designator M1)
M1_DriverChannelDRV88253 "Molex 0705430003" 4POL254 3555,175 r0 top (schematic designator M1)
M1_DriverChannelDRV88254 "Molex 0705430003" 4POL254 4480,175 r0 top (schematic designator M1)
M1_DriverChannelDRV88255 "Molex 0705430003" 4POL254 5405,175 r0 top (schematic designator M1)
MAX1_EndstopChannel1 "Molex 70543-03" 70543-03 605,1085 r270 top (schematic designator MAX1)
MAX1_EndstopChannel2 "Molex 70543-03" 70543-03 605,245 r270 top (schematic designator MAX1)
MAX1_EndstopChannel3 "Molex 70543-03" 70543-03 605,665 r270 top (schematic designator MAX1)
MIN1_EndstopChannel1 "Molex 70543-03" 70543-03 845,1085 r90 top (schematic designator MIN1)
MIN1_EndstopChannel2 "Molex 70543-03" 70543-03 845,245 r90 top (schematic designator MIN1)
MIN1_EndstopChannel3 "Molex 70543-03" 70543-03 845,665 r90 top (schematic designator MIN1)
P2_ThermistorChannel1 "Molex 70543-02" 70543-02 3685,4305 r180 top (schematic designator P2)
P2_ThermistorChannel2 "Molex 70543-02" 70543-02 3300,4305 r180 top (schematic designator P2)
P3_DriverChannelDRV88251 "Header 5" HDR1X5 1917,1233 r180 top (schematic designator P3)
P3_DriverChannelDRV88252 "Header 5" HDR1X5 2842,1233 r180 top (schematic designator P3)
P3_DriverChannelDRV88253 "Header 5" HDR1X5 3767,1233 r180 top (schematic designator P3)
P3_DriverChannelDRV88254 "Header 5" HDR1X5 4692,1233 r180 top (schematic designator P3)
P3_DriverChannelDRV88255 "Header 5" HDR1X5 5617,1233 r180 top (schematic designator P3)
"Power Input1" "con-phoenix-508" MSTBV6 5780,4090 r0 top
Q2 "IRML6346TRPBF" IRLML6346 2495,3983.94 r90 top
Q3 "IRML6346TRPBF" IRLML6346 2145,3983.94 r90 top
Q4 "PSMN7R0-60YS" PSMN7R0-60YS 561.5,3713.39 r90 top
Q5 "PSMN7R0-60YS" PSMN7R0-60YS 961,3713 r90 top
Q6 "PSMN7R0-60YS" PSMN7R0-60YS 1361,3713 r90 top
Q7 "PSMN7R0-60YS" PSMN7R0-60YS 1761,3713 r90 top
R1 "Res3" J1-0603 3005,4385 r90 top
R2_EndstopChannel1 "0603" J1-0603 1035,984.53 r270 top (schematic designator R2)
R2_EndstopChannel2 "0603" J1-0603 1035,144.53 r270 top (schematic designator R2)
R2_EndstopChannel3 "0603" J1-0603 1035,564.53 r270 top (schematic designator R2)
R3_EndstopChannel1 "0603" J1-0603 1035,1184.53 r90 top (schematic designator R3)
R3_EndstopChannel2 "0603" J1-0603 1035,344.53 r90 top (schematic designator R3)
R3_EndstopChannel3 "0603" J1-0603 1035,764.53 r90 top (schematic designator R3)
R7 "Res3" J1-0603 5875,2649 r90 top
R8 "Res3" "SM 0805 - gap trimmed" 5313.23,2280 r180 top
R9 "Res3" J1-0603 5845,2794 r180 top
R10 "Res3" J1-0603 5875,2539 r90 top
R11 "Res3" "SM 0805 - gap trimmed" 5033.45,2390.82 r90 top
R12 "0603" J1-0603 5021.45,2554.82 r270 top
R13 "0805" "SM 0805 - gap trimmed" 2610,3993.94 r270 top
R13_ThermistorChannel1 "Res3" J1-0603 3655,4130 r270 top (schematic designator R13)
R13_ThermistorChannel2 "Res3" J1-0603 3270,4130 r270 top (schematic designator R13)
R14 "0603" J1-0603 2540,3853.94 r90 top
R14_ThermistorChannel1 "Res3" J1-0603 3720,4130 r90 top (schematic designator R14)
R14_ThermistorChannel2 "Res3" J1-0603 3335,4130 r90 top (schematic designator R14)
R15 "0603" J1-0603 435,5799.53 r90 top
R16 "0603" J1-0603 215,5799.53 r90 top
R17 "0603" J1-0603 1475,2950 r180 top
R18 "0603" J1-0603 802,3001 r180 top
R19 "0603" J1-0603 1475,3000 r180 top
R20 "0603" J1-0603 802,2951 r180 top
R21 "Res3" J1-0603 1755,5244.53 r90 top
R22 "0603" J1-0603 6605,1735 r90 top
R23 "Res3" J1-0603 6660,1735 r90 top
R24 "0603" J1-0603 2105,5564.53 r90 top
R25 "0603" J1-0603 2335,5564.53 r90 top
R26 "0603" J1-0603 6083.26,5338.02 r90 top
R27 "0603" J1-0603 6138.26,5388.02 r90 top
R28 "0603" J1-0603 6540,1350 r270 top
R29 "0603" J1-0603 6490,1350 r270 top
R30_DriverChannelDRV88251 "0603" J1-0603 1275,685 r90 top (schematic designator R30)
R30_DriverChannelDRV88252 "0603" J1-0603 2200,685 r90 top (schematic designator R30)
R30_DriverChannelDRV88253 "0603" J1-0603 3125,685 r90 top (schematic designator R30)
R30_DriverChannelDRV88254 "0603" J1-0603 4050,685 r90 top (schematic designator R30)
R30_DriverChannelDRV88255 "0603" J1-0603 4975,685 r90 top (schematic designator R30)
R31 "Res3" J1-0603 1795,1490 r180 top
R32_DriverChannelDRV88251 "2512" Resistor2512 1780,540 r90 top (schematic designator R32)
R32_DriverChannelDRV88252 "2512" Resistor2512 2705,540 r90 top (schematic designator R32)
R32_DriverChannelDRV88253 "2512" Resistor2512 3630,540 r90 top (schematic designator R32)
R32_DriverChannelDRV88254 "2512" Resistor2512 4555,540 r90 top (schematic designator R32)
R32_DriverChannelDRV88255 "2512" Resistor2512 5480,540 r90 top (schematic designator R32)
R33_DriverChannelDRV88251 "2512" Resistor2512 1630,540 r90 top (schematic designator R33)
R33_DriverChannelDRV88252 "2512" Resistor2512 2555,540 r90 top (schematic designator R33)
R33_DriverChannelDRV88253 "2512" Resistor2512 3480,540 r90 top (schematic designator R33)
R33_DriverChannelDRV88254 "2512" Resistor2512 4405,540 r90 top (schematic designator R33)
R33_DriverChannelDRV88255 "2512" Resistor2512 5330,540 r90 top (schematic designator R33)
R37 "0603" J1-0603 5100.45,2606.82 r270 top
R38 "0603" J1-0603 5100.45,2706.82 r270 top
R45 "0603" J1-0603 2450,3853.94 r90 top
R46 "0603" J1-0603 2475,3778.94 r0 top
R47 "0805" "SM 0805 - gap trimmed" 2260,3993.94 r270 top
R48 "0603" J1-0603 2190,3853.94 r90 top
R52 "0603" J1-0603 2100,3848.94 r90 top
R55 "0603" J1-0603 2125,3773.94 r0 top
R56 "0805" "SM 0805 - gap trimmed" 355,3790 r90 top
R57 "0603" J1-0603 650,3920 r90 top
R58 "0603" J1-0603 640,3515 r90 top
R59 "0603" J1-0603 560,3485 r180 top
R60 "0805" "SM 0805 - gap trimmed" 755,3790 r90 top
R61 "0603" J1-0603 1046,3918 r90 top
R62 "0603" J1-0603 1021,3534.61 r0 top
R63 "0603" J1-0603 901,3534.61 r180 top
R64 "0805" "SM 0805 - gap trimmed" 1155,3790 r90 top
R65 "0603" J1-0603 1446,3918 r90 top
R66 "0603" J1-0603 1421,3533 r0 top
R67 "0603" J1-0603 1301,3533 r180 top
R68 "0805" "SM 0805 - gap trimmed" 1555,3790 r90 top
R69 "0603" J1-0603 1846,3920.64 r90 top
R70 "0603" J1-0603 1821,3530.64 r0 top
R71 "0603" J1-0603 1701,3530.64 r180 top
RESET1 "Tactile Switch" TL3301 6540,2645 r90 top
SPD1 "Header 3" HDR1X3 1294.12,3370.88 r180 top
T2_ThermocoupleChannel1 "Molex 70543-02" 70543-02 3685,3750 r180 top (schematic designator T2)
T2_ThermocoupleChannel2 "Molex 70543-02" 70543-02 3300,3750 r180 top (schematic designator T2)
THM_TP1_ThermistorChannel1 "TP4" PIN1 3815,4020 r180 top (schematic designator THM_TP1)
THM_TP1_ThermistorChannel2 "TP4" PIN1 3430,4020 r180 top (schematic designator THM_TP1)
TRST1 "Header 2" HDR1X2 6465,1875 r270 top
U1 "MIC24085" MIC24085-AYML 5750,2574 r90 top
U2 "TPS62142RGTT" RGT16-1700X1700TP 4965.45,2686.82 r90 top
U3 "AD5206" "AD5206 & AD5204" 1210,1475 r0 top
U4_ThermocoupleChannel1 "MAX31855EASA+" MAXM-S8+4_N 3680,3475 r180 top (schematic designator U4)
U4_ThermocoupleChannel2 "MAX31855EASA+" MAXM-S8+4_N 3295,3475 r180 top (schematic designator U4)
U5 "ATSAM4E16EA-AU" LQFP144_N 1050,2190 r0 top
U6 "ADuM4160" ADuM4160 1114,3075 r0 top
U7_DriverChannelDRV88251 "DRV8825" DRV8825 1705,955 r90 top (schematic designator U7)
U7_DriverChannelDRV88252 "DRV8825" DRV8825 2630,955 r90 top (schematic designator U7)
U7_DriverChannelDRV88253 "DRV8825" DRV8825 3555,955 r90 top (schematic designator U7)
U7_DriverChannelDRV88254 "DRV8825" DRV8825 4480,955 r90 top (schematic designator U7)
U7_DriverChannelDRV88255 "DRV8825" DRV8825 5405,955 r90 top (schematic designator U7)
U10 "Allegro A3944" "A3944 28 Pin TSSOP" 2304.84,3497.2 r270 top
USB "USB-B" PN61729 435,3080 r270 top
X2 "445C35A12M00000" 445C35A12M00000 5560.41,6736.97 r180 top

## Footprints (in the part's own frame and the unit in brackets; to place one, negate y for a bottom-side part, rotate by r counter-clockwise, add the part's x,y. Pads: shape width x height; smd on the part's side, far side on the other; paste and mask are expansions set on the pad)
1N4148WT [mm] "Molded Diode, 2-Leads, Body 1.20x0.80mm, IPC Medium Density"
  rect 1x0.3 smd: 1(-0.675,0) 2(0.675,0)
  silkscreen extent -0.7,-0.5 1.15,0.55, body extent -0.65,-0.45 0.65,0.45, height 0.7
4POL254 [mil]
  oval 60x120 hole 40: 1(-150,0) 2(-50,0) 3(50,0) 4(150,0)
  silkscreen extent -250,-150 250,113, body extent -250,-150 250,113, height 454
445C35A12M00000 [mm] "Crystal Oscillator"
  rect 1.8x2.4 smd: 1(0,0) 2(3.8,0)
  silkscreen extent -1.65,-1.9 5.46,1.91, body extent -1.27,-1.52 5.08,1.52, height 1
1608[0603] [mm] "Chip Capacitor, Body 1.6x0.8mm, IPC High Density"
  rect 0.8x0.9 smd: 1(-0.7,0) 2(0.7,0)
  body extent -0.87,-0.48 0.87,0.48, height 1.3
3522-2 [mil] "3522-2"
  oct 140x140 hole 100: 1(-280,0) 1(-80,0) 2(80,0) 2(280,0)
  silkscreen extent -400,-100 400,100, body extent -402,-103 402,103, height 299
70543-02 [mil]
  oval 60x120 hole 40: 1(-50,0) 2(50,0)
  silkscreen extent -150,-150 150,113, body extent -150,-150 150,113, height 450
70543-03 [mil]
  oval 60x120 hole 40: 1(-100,0) 2(0,0) 3(100,0)
  silkscreen extent -200,-150 200,113, body extent -200,-150 200,113, height 450
"A3944 28 Pin TSSOP" [mm] "TSOP, 28-Leads, Body 9.70x4.40mm, Pitch 0.65mm, Thermal Pad 5.08.2x3.00.2mm, IPC Medium Density"
  oval 1.7x0.35 smd: 1(-2.85,4.225) 2(-2.85,3.575) 3(-2.85,2.925) 4(-2.85,2.275) 5(-2.85,1.625) 6(-2.85,0.975) 7(-2.85,0.325) 8(-2.85,-0.325) 9(-2.85,-0.975) 10(-2.85,-1.625) 11(-2.85,-2.275) 12(-2.85,-2.925) 13(-2.85,-3.575) 14(-2.85,-4.225) 15(2.85,-4.225) 16(2.85,-3.575) 17(2.85,-2.925) 18(2.85,-2.275) 19(2.85,-1.625) 20(2.85,-0.975) 21(2.85,-0.325) 22(2.85,0.325) 23(2.85,0.975) 24(2.85,1.625) 25(2.85,2.275) 26(2.85,2.925) 27(2.85,3.575) 28(2.85,4.225)
  rect 3x5.08 smd: 29(0,0)
  silkscreen extent -2.97,-4.9 1.6,5.08, body extent -2.25,-4.9 2.25,4.9, height 1.2
"AD5206 & AD5204" [mm] "SOP, 24-Leads, Body 7.80x4.40mm, Pitch 0.65mm, IPC Medium Density"
  oval 1.55x0.35 smd: 1(-2.875,3.575) 2(-2.875,2.925) 3(-2.875,2.275) 4(-2.875,1.625) 5(-2.875,0.975) 6(-2.875,0.325) 7(-2.875,-0.325) 8(-2.875,-0.975) 9(-2.875,-1.625) 10(-2.875,-2.275) 11(-2.875,-2.925) 12(-2.875,-3.575) 13(2.875,-3.575) 14(2.875,-2.925) 15(2.875,-2.275) 16(2.875,-1.625) 17(2.875,-0.975) 18(2.875,-0.325) 19(2.875,0.325) 20(2.875,0.975) 21(2.875,1.625) 22(2.875,2.275) 23(2.875,2.925) 24(2.875,3.575)
  silkscreen extent -3,-3.95 1.7,4.42, body extent -2.25,-3.95 2.25,3.95, height 2.65
ADuM4160 [mm] "SOIC, 16-Leads, Body 10.30x7.50mm, Pitch 1.27mm, IPC Medium Density"
  oval 2.3x0.6 smd: 1(-4.575,4.445) 2(-4.575,3.175) 3(-4.575,1.905) 4(-4.575,0.635) 5(-4.575,-0.635) 6(-4.575,-1.905) 7(-4.575,-3.175) 8(-4.575,-4.445) 9(4.575,-4.445) 10(4.575,-3.175) 11(4.575,-1.905) 12(4.575,-0.635) 13(4.575,0.635) 14(4.575,1.905) 15(4.575,3.175) 16(4.575,4.445)
  silkscreen extent -4.7,-5.25 3.03,5.42, body extent -3.8,-5.25 3.8,5.25, height 2.65
BLM18PG121SN1D [mm] "Chip Inductor, 2-Leads, Body 1.0x0.5mm, IPC Medium Density"
  rect 0.8x0.6 smd: 1(-0.6,0) 2(0.6,0)
  body extent -0.52,-0.28 0.53,0.27, height 0.6
C1206 [mm] "Chip Capacitor, Body 3.2x1.6mm, IPC High Density"
  rect 1.1x1.7 smd: 1(-1.35,0) 2(1.35,0)
  silkscreen extent -0.4,-0.75 0.4,0.75, body extent -1.7,-0.9 1.7,0.9, height 1.3
C1210 [mm] "Chip Capacitor, Body 3.2x2.5mm, IPC High Density"
  rect 1.1x2.6 smd: 1(-1.35,0) 2(1.35,0)
  silkscreen extent -0.4,-1.2 0.4,1.2, body extent -1.7,-1.35 1.7,1.35, height 1.3
CIP0530LR3R3 [mm] "Precision Wire Wound Inductor, 2-Leads, Body 5.58x5.30mm, IPC Medium Density"
  rect 2.55x2.7 smd: 1(-2.175,0) 2(2.175,0)
  silkscreen extent -2.9,-2.7 2.9,2.7, body extent -2.88,-2.7 2.88,2.7, height 2.29
DRV8825 [mm] "TSOP, 28-Leads, Body 9.70x4.40mm, Pitch 0.65mm, Thermal Pad 5.22.2x3.10.2mm, IPC Medium Density"
  oval 1.7x0.35 smd: 1(-2.85,4.225) 2(-2.85,3.575) 3(-2.85,2.925) 4(-2.85,2.275) 5(-2.85,1.625) 6(-2.85,0.975) 7(-2.85,0.325) 8(-2.85,-0.325) 9(-2.85,-0.975) 10(-2.85,-1.625) 11(-2.85,-2.275) 12(-2.85,-2.925) 13(-2.85,-3.575) 14(-2.85,-4.225) 15(2.85,-4.225) 16(2.85,-3.575) 17(2.85,-2.925) 18(2.85,-2.275) 19(2.85,-1.625) 20(2.85,-0.975) 21(2.85,-0.325) 22(2.85,0.325) 23(2.85,0.975) 24(2.85,1.625) 25(2.85,2.275) 26(2.85,2.925) 27(2.85,3.575) 28(2.85,4.225)
  rect 3.1x5.22 smd: 29(0,0)
  silkscreen extent -2.97,-4.9 1.6,5.07, body extent -2.25,-4.9 2.25,4.9, height 1.2
F1210_M [mm] "Bournes PTC Fuse"
  rect 1x2.5 smd: 1(-1.5,0) 2(1.5,0)
  silkscreen extent -0.4,-1.3 0.4,1.3, body extent -1.7,-1.35 1.7,1.4, height 0.85
HDR1X2 [mm] "Connector; Header; 2 Position"
  rect 1.5x1.5 hole 0.9: 1(0,0)
  round 1.5 hole 0.9: 2(2.54,0)
  silkscreen extent -1.27,-1.27 3.81,1.27
HDR1X3 [mm] "Connector; Header; 3 Position"
  rect 1.5x1.5 hole 0.9: 1(0,0)
  round 1.5 hole 0.9: 2(2.54,0) 3(5.08,0)
  silkscreen extent -1.27,-1.27 6.35,1.27
HDR1X5 [mm] "Connector; Header; 5 Position"
  rect 1.5x1.5 hole 0.9: 1(0,0)
  round 1.5 hole 0.9: 2(2.54,0) 3(5.08,0) 4(7.62,0) 5(10.16,0)
  silkscreen extent -1.27,-1.27 11.43,1.27
HDR2X20 [mm] "Connector; Header; 20x2 Position"
  rect 1.5x1.5 hole 0.9: 1(0,0)
  round 1.5 hole 0.9: 2(0,2.54) 3(2.54,0) 4(2.54,2.54) 5(5.08,0) 6(5.08,2.54) 7(7.62,0) 8(7.62,2.54) 9(10.16,0) 10(10.16,2.54) 11(12.7,0) 12(12.7,2.54) 13(15.24,0) 14(15.24,2.54) 15(17.78,0) 16(17.78,2.54) 17(20.32,0) 18(20.32,2.54) 19(22.86,0) 20(22.86,2.54) 21(25.4,0) 22(25.4,2.54) 23(27.94,0) 24(27.94,2.54) 25(30.48,0) 26(30.48,2.54) 27(33.02,0) 28(33.02,2.54) 29(35.56,0) 30(35.56,2.54) 31(38.1,0) 32(38.1,2.54) 33(40.64,0) 34(40.64,2.54) 35(43.18,0) 36(43.18,2.54) 37(45.72,0) 38(45.72,2.54) 39(48.26,0) 40(48.26,2.54)
  silkscreen extent -1.27,-1.27 49.53,3.81
IRLML6346 [mm] "SOT23, 3-Leads, Body 2.92x2.37mm, Pitch 0.95mm, IPC Medium Density"
  rect 1.6x0.6 smd: 1(-0.9,0.95) 2(-0.9,-0.95) 3(0.9,0)
  silkscreen extent -1.02,-1.5 0.7,1.92, body extent -0.7,-1.52 0.7,1.52, height 1.12
J1-0603 [mm] "Chip Resistor, Body 1.6x0.8mm, IPC High Density"
  rect 0.7x0.9 smd: 1(-0.75,0) 2(0.75,0)
  silkscreen extent -0.2,-0.35 0.2,0.35, body extent -0.85,-0.48 0.85,0.48, height 0.9
LQFP144_N [mm] "Thin QFP, 144-Leads, Body 20x20mm, Pitch 0.5mm, IPC Medium Density"
  oval 1.8x0.3 smd: 1(-10.55,8.75) 2(-10.55,8.25) 3(-10.55,7.75) 4(-10.55,7.25) 5(-10.55,6.75) 6(-10.55,6.25) 7(-10.55,5.75) 8(-10.55,5.25) 9(-10.55,4.75) 10(-10.55,4.25) 11(-10.55,3.75) 12(-10.55,3.25) 13(-10.55,2.75) 14(-10.55,2.25) 15(-10.55,1.75) 16(-10.55,1.25) 17(-10.55,0.75) 18(-10.55,0.25) 19(-10.55,-0.25) 20(-10.55,-0.75) 21(-10.55,-1.25) 22(-10.55,-1.75) 23(-10.55,-2.25) 24(-10.55,-2.75) 25(-10.55,-3.25) 26(-10.55,-3.75) 27(-10.55,-4.25) 28(-10.55,-4.75) 29(-10.55,-5.25) 30(-10.55,-5.75) 31(-10.55,-6.25) 32(-10.55,-6.75) 33(-10.55,-7.25) 34(-10.55,-7.75) 35(-10.55,-8.25) 36(-10.55,-8.75) 73(10.55,-8.75) 74(10.55,-8.25) 75(10.55,-7.75) 76(10.55,-7.25) 77(10.55,-6.75) 78(10.55,-6.25) 79(10.55,-5.75) 80(10.55,-5.25) 81(10.55,-4.75) 82(10.55,-4.25) 83(10.55,-3.75) 84(10.55,-3.25) 85(10.55,-2.75) 86(10.55,-2.25) 87(10.55,-1.75) 88(10.55,-1.25) 89(10.55,-0.75) 90(10.55,-0.25) 91(10.55,0.25) 92(10.55,0.75) 93(10.55,1.25) 94(10.55,1.75) 95(10.55,2.25) 96(10.55,2.75) 97(10.55,3.25) 98(10.55,3.75) 99(10.55,4.25) 100(10.55,4.75) 101(10.55,5.25) 102(10.55,5.75) 103(10.55,6.25) 104(10.55,6.75) 105(10.55,7.25) 106(10.55,7.75) 107(10.55,8.25) 108(10.55,8.75)
  oval 0.3x1.8 smd: 37(-8.75,-10.55) 38(-8.25,-10.55) 39(-7.75,-10.55) 40(-7.25,-10.55) 41(-6.75,-10.55) 42(-6.25,-10.55) 43(-5.75,-10.55) 44(-5.25,-10.55) 45(-4.75,-10.55) 46(-4.25,-10.55) 47(-3.75,-10.55) 48(-3.25,-10.55) 49(-2.75,-10.55) 50(-2.25,-10.55) 51(-1.75,-10.55) 52(-1.25,-10.55) 53(-0.75,-10.55) 54(-0.25,-10.55) 55(0.25,-10.55) 56(0.75,-10.55) 57(1.25,-10.55) 58(1.75,-10.55) 59(2.25,-10.55) 60(2.75,-10.55) 61(3.25,-10.55) 62(3.75,-10.55) 63(4.25,-10.55) 64(4.75,-10.55) 65(5.25,-10.55) 66(5.75,-10.55) 67(6.25,-10.55) 68(6.75,-10.55) 69(7.25,-10.55) 70(7.75,-10.55) 71(8.25,-10.55) 72(8.75,-10.55) 109(8.75,10.55) 110(8.25,10.55) 111(7.75,10.55) 112(7.25,10.55) 113(6.75,10.55) 114(6.25,10.55) 115(5.75,10.55) 116(5.25,10.55) 117(4.75,10.55) 118(4.25,10.55) 119(3.75,10.55) 120(3.25,10.55) 121(2.75,10.55) 122(2.25,10.55) 123(1.75,10.55) 124(1.25,10.55) 125(0.75,10.55) 126(0.25,10.55) 127(-0.25,10.55) 128(-0.75,10.55) 129(-1.25,10.55) 130(-1.75,10.55) 131(-2.25,10.55) 132(-2.75,10.55) 133(-3.25,10.55) 134(-3.75,10.55) 135(-4.25,10.55) 136(-4.75,10.55) 137(-5.25,10.55) 138(-5.75,10.55) 139(-6.25,10.55) 140(-6.75,10.55) 141(-7.25,10.55) 142(-7.75,10.55) 143(-8.25,10.55) 144(-8.75,10.55)
  silkscreen extent -10.67,-9.25 9.25,9.57, body extent -10,-10 10,10, height 1.6
MAXM-S8+4_N [mm] "SOIC, 8-Leads, Body 4.9x3.9mm, Pitch 1.27mm, IPC Medium Density"
  oval 2.2x0.6 smd: 1(-2.4,1.905) 2(-2.4,0.635) 3(-2.4,-0.635) 4(-2.4,-1.905) 5(2.4,-1.905) 6(2.4,-0.635) 7(2.4,0.635) 8(2.4,1.905)
  silkscreen extent -2.53,-2.5 0.9,2.88, body extent -2,-2.5 2,2.5, height 1.75
MIC24085-AYML [mm] "QFN, 16-Leads, Body 3.25x3.25mm, Pitch 0.50mm, Thermal Pad 1.73x1.73mm, IPC Medium Density"
  oval 0.8x0.25 smd: 1(-1.7,0.75) 2(-1.7,0.25) 3(-1.7,-0.25) 4(-1.7,-0.75) 9(1.7,-0.75) 10(1.7,-0.25) 11(1.7,0.25) 12(1.7,0.75)
  oval 0.25x0.8 smd: 5(-0.75,-1.7) 6(-0.25,-1.7) 7(0.25,-1.7) 8(0.75,-1.7) 13(0.75,1.7) 14(0.25,1.7) 15(-0.25,1.7) 16(-0.75,1.7)
  rect 1.73x1.73 smd: 17(0,0)
  silkscreen extent -2.67,-1.9 1.9,1.9, body extent -1.75,-1.75 1.75,1.75, height 0.85
MSTBV4 [mil]
  oval 165x82.5 hole 55: 1(0,700) 2(0,500) 3(0,300) 4(0,100) 5(0,-100) 6(0,-300) 7(0,-500) 8(0,-700)
  silkscreen extent -150,-825 180,825, body extent -150,-825 180,825, height 472
MSTBV6 [mil]
  oval 165x82.5 hole 55: 1(0,0) 2(0,-200) 3(0,-400) 4(0,-600) 5(0,-800) 6(0,-1000)
  silkscreen extent -150,-1125 180,125, body extent -150,-1125 180,125, height 472
"Panasonic VS C" [mm]
  rect 3x1.4 smd: 1(5.348,2.921) 2(0.748,2.921)
  silkscreen extent 0.05,0.22 6.05,5.62, body extent 0.1,0.29 6,5.59, height 5.41
"Panasonic VS D" [mm]
  rect 3.4x1.4 smd: 1(2.6,0) 2(-2.6,0)
  silkscreen extent -3,-3.2 3,3.2, body extent -3.5,-3.3 3.5,3.3, height 5.4
PIN1 [mm] "Connector; Plug"
  rect 1.5x1.5 hole 0.9: 1(0,0)
  silkscreen extent -1.4,-1.4 1.4,2.17
PMEG1030EH_EJ [mm] "Molded Diode, 2-Leads, Body 2.60x1.60mm, IPC Medium Density"
  rect 1.3x0.65 smd: 1(-1.225,0) 2(1.225,0)
  silkscreen extent -1.4,-0.85 1.85,0.85, body extent -1.35,-0.85 1.35,0.85, height 1.2
PN61729 [mil]
  oct 66x66 hole 38: 1(50,186) 2(-49.21,186) 3(-49.21,107) 4(50,107)
  round 130.5 hole 87: 5(-236.22,0) 6(237,0)
  silkscreen extent -232,-400 233,221, body extent -237,-405 238,226, height 406
PSMN7R0-60YS [mm] "TO, 5-Pads, Body 5.15x5.86mm (max), IPC Medium Density"
  rect 1.8x0.6 smd: 1(-2.6,1.905) 2(-2.6,0.635) 3(-2.6,-0.635) 4(-2.6,-1.905)
  rect 4.8x4.5 smd: 5(1.14,0)
  silkscreen extent -2.72,2.63 -2.48,2.88, body extent -1.85,-2.5 2.25,2.5, height 1.2
Resistor2512 [mm]
  rect 1.6x3.1 smd: 1(-3.25,0) 2(3.25,0)
  silkscreen extent -2.26,-1.3 2.26,1.3, body extent -3.24,-1.4 3.24,1.4, height 0.9
RGT16-1700X1700TP [mm] "QFN, 16-Leads, Body 3x3mm, Pitch 0.5mm, Thermal Pad 1.7x1.7mm, TI Recommended"
  oval 0.85x0.28 smd paste-0.025 mask+0.07: 1(-1.475,0.75) 2(-1.475,0.25) 3(-1.475,-0.25) 4(-1.475,-0.75) 9(1.475,-0.75) 10(1.475,-0.25) 11(1.475,0.25) 12(1.475,0.75)
  oval 0.28x0.85 smd paste-0.025 mask+0.07: 5(-0.75,-1.475) 6(-0.25,-1.475) 7(0.25,-1.475) 8(0.75,-1.475) 13(0.75,1.475) 14(0.25,1.475) 15(-0.25,1.475) 16(-0.75,1.475)
  rect 1.7x1.7 smd paste-0.85 mask+0.07: 17(0,0)
  silkscreen extent -2.5,-1.73 1.73,1.73, body extent -1.57,-1.57 1.58,1.58, height 1
S9015E-05-ND [mm] "10 Pin Cortex JTAG Debug Header"
  round 1.1 hole 0.508: 1(5.08,0) 2(5.08,-1.27) 3(3.81,0) 4(3.81,-1.27) 5(2.54,0) 6(2.54,-1.27) 7(1.27,0) 8(1.27,-1.27) 9(0,0) 10(0,-1.27)
  round 0.5 on Top Overlay: 1(7,0.8)
  silkscreen extent -1.25,-2.5 6.5,1.25
SK310A-TP [mm] "Molded Diode, 2-Leads, Body 4.31x2.69mm, IPC Medium Density"
  rect 2.3x2.15 smd: 1(-1.625,0) 2(1.625,0)
  silkscreen extent -2.3,-1.45 3.07,1.75, body extent -2.29,-1.42 2.28,1.42, height 2.95
"SM 0805 - gap trimmed" [mm]
  rect 1x1.5 smd: 1(-1.1,0) 2(1.1,0)
  silkscreen extent -0.36,-0.64 0.35,0.63
"SM 0805 polarized" [mm]
  rect 1x1.5 smd: 1(0.93,-1.105) 2(3.13,-1.105)
  silkscreen extent 0.1,-1.9 2.38,-0.3
SZMM3Z4V7T1G [mm] "Molded Diode, 2-Leads, Body 1.70x1.25mm, IPC Medium Density"
  rect 0.9x0.35 smd: 1(-1,0) 2(1,0)
  silkscreen extent -0.95,-0.7 1.4,0.7, body extent -0.9,-0.67 0.9,0.67, height 1
TL3301 [mm]
  rect 1.4x2.1 smd: 1(-2.3,4.5) 1(-2.3,-4.5) 2(2.3,4.5) 2(2.3,-4.5)
  silkscreen extent -2.2,-2.4 2.2,2.4
VLS252012T-2R2M1R3 [mm] "Precision Wire Wound Inductor, 2-Leads, Body 2.5x2.0mm, IPC Medium Density"
  rect 1.65x2.1 smd: 1(-1.025,0) 2(1.025,0)
  body extent -1.3,-1.05 1.3,1.05, height 1.2

## Part data
1 kRESET TRST1: "Header, 2-Pin"
C1_EndstopChannel1 C1_EndstopChannel2 C1_EndstopChannel3 C2_EndstopChannel1 C2_EndstopChannel2 C2_EndstopChannel3 C4 C5 C6 C9 C14 C15 C17 C18 C19 C20 C21 C22 C23 C24 C25 C26 C27 C29 C32 C33 C34 C35 C36 C37 C38 C39 C40 C41 C42 C43 C44 C45 C46 C47 C48 C49 C50 C51 C52 C54 C55 C56 C57 C58 C59 C64 C65 C66_DriverChannelDRV88251 C66_DriverChannelDRV88252 C66_DriverChannelDRV88253 C66_DriverChannelDRV88254 C66_DriverChannelDRV88255 C68_DriverChannelDRV88251 C68_DriverChannelDRV88252 C68_DriverChannelDRV88253 C68_DriverChannelDRV88254 C68_DriverChannelDRV88255 C71_DriverChannelDRV88251 C71_DriverChannelDRV88252 C71_DriverChannelDRV88253 C71_DriverChannelDRV88254 C71_DriverChannelDRV88255: library part "Cap Semi", "Capacitor (Semiconductor SIM Model)"
C3 C12 C16 C28 C69_DriverChannelDRV88251 C69_DriverChannelDRV88252 C69_DriverChannelDRV88253 C69_DriverChannelDRV88254 C69_DriverChannelDRV88255 C70_DriverChannelDRV88251 C70_DriverChannelDRV88252 C70_DriverChannelDRV88253 C70_DriverChannelDRV88254 C70_DriverChannelDRV88255: library part "Cap Pol1", "Polarized Capacitor (Radial)"
C7 C8 C10 C11 C13 C30_ThermistorChannel1 C30_ThermistorChannel2 C31_ThermocoupleChannel1 C31_ThermocoupleChannel2 C60 C61 C62 C63: "Capacitor (Semiconductor SIM Model)"
D1: library part "D Zener", "Zener Diode"
D4 D6 D8 D12 D15 D17 D19: library part "D Schottky", "Schottky Diode"
D5: "Default Diode"
D7 D9: "Typical RED, GREEN, YELLOW, AMBER GaAs LED"
D10 D11 D13 D14 D16 D18: "Typical RED GaAs LED"
D11_ThermistorChannel1 D11_ThermistorChannel2 D12_ThermistorChannel1 D12_ThermistorChannel2: "High Conductance Fast Diode"
EXP0: "Header, 20-Pin, Dual row"
F1 F2 F3 F4: library part "Fuse 1", "Fuse"
FB2 FB3 FB4 FB9 L2: library part Inductor, "Inductor"
FETS: library part con-phoenix-508
"Logic Source1" SPD1: "Header, 3-Pin"
M1_DriverChannelDRV88251 M1_DriverChannelDRV88252 M1_DriverChannelDRV88253 M1_DriverChannelDRV88254 M1_DriverChannelDRV88255: library part "Molex 0705430003 Alt", "Molex 4 Pin Clip Connector"
MAX1_EndstopChannel1 MAX1_EndstopChannel2 MAX1_EndstopChannel3 MIN1_EndstopChannel1 MIN1_EndstopChannel2 MIN1_EndstopChannel3: library part "Molex Endstop"
P3_DriverChannelDRV88251 P3_DriverChannelDRV88252 P3_DriverChannelDRV88253 P3_DriverChannelDRV88254 P3_DriverChannelDRV88255: "Header, 5-Pin"
Q2 Q3 Q4 Q5 Q6 Q7: "N-Channel MOSFET"
R1 R7 R8 R9 R10 R11 R13_ThermistorChannel1 R13_ThermistorChannel2 R14_ThermistorChannel1 R14_ThermistorChannel2 R21 R23 R31: "Resistor"
R2_EndstopChannel1 R2_EndstopChannel2 R2_EndstopChannel3 R3_EndstopChannel1 R3_EndstopChannel2 R3_EndstopChannel3 R12 R13 R14 R15 R16 R17 R18 R19 R20 R22 R24 R25 R26 R27 R28 R29 R30_DriverChannelDRV88251 R30_DriverChannelDRV88252 R30_DriverChannelDRV88253 R30_DriverChannelDRV88254 R30_DriverChannelDRV88255 R32_DriverChannelDRV88251 R32_DriverChannelDRV88252 R32_DriverChannelDRV88253 R32_DriverChannelDRV88254 R32_DriverChannelDRV88255 R33_DriverChannelDRV88251 R33_DriverChannelDRV88252 R33_DriverChannelDRV88253 R33_DriverChannelDRV88254 R33_DriverChannelDRV88255 R37 R38 R45 R46 R47 R48 R52 R55 R56 R57 R58 R59 R60 R61 R62 R63 R64 R65 R66 R67 R68 R69 R70 R71: library part Res3, "Resistor"
THM_TP1_ThermistorChannel1 THM_TP1_ThermistorChannel2: library part Socket, "Socket"
U2: "Buck Step Down Regulator with 3 to 17 V Input and 3.3 V Output, -40 to 85 degC, 16-Pin QFN (RGT), Green (RoHS & no Sb/Br)"
U4_ThermocoupleChannel1 U4_ThermocoupleChannel2: "Cold Junction Compensated Thermocouple to Digital Converter, 14 Bits Temperature Resolution, -40 to 125 degC, 8-Pin SOIC (S8+4), Pb-Free"
U5: library part ATML-ATSAM4EXEA-LQFP-144
U6: "USB Opto Isolator"
U7_DriverChannelDRV88251 U7_DriverChannelDRV88252 U7_DriverChannelDRV88253 U7_DriverChannelDRV88254 U7_DriverChannelDRV88255: "DRV8825 Ti Stepper Driver"
U10: library part "A3944 - MOSFET Low Side Driver", "Allegro Micro A3944 MOST Driver (low side)"
X2: library part XTAL, "Crystal Oscillator"

## Free pads (board coordinates)
  rect 150x150 hole 100: ""(130,130) ""(130,4368.94) ""(5865,4370) ""(5870,130)

## Via types
v1: diameter 30, hole 15, Top Layer to Bottom Layer, 351 vias
v2: diameter 25, hole 15, Top Layer to Bottom Layer, 156 vias
v3: diameter 19.68, hole 7.87, Top Layer to Bottom Layer, 90 vias
v4: diameter 50, hole 20, Top Layer to Bottom Layer, 19 vias
v5: diameter 30, hole 20, Top Layer to Bottom Layer, 3 vias
v6: diameter 50, hole 28, Top Layer to Bottom Layer, 1 vias